# Altium PCB main_board.PcbDoc (part 1 of 3)
Units mm, origin at the board's own origin, x right, y up, seen from the top; angles counter-clockwise.
Board outline 156 x 135 mm, 4 copper layers (Top Side, Ground Plane, Power Plane, Bottom Side), stack 1.602 mm thick; 329 components, 291 nets, 1334 pads, 943 vias.
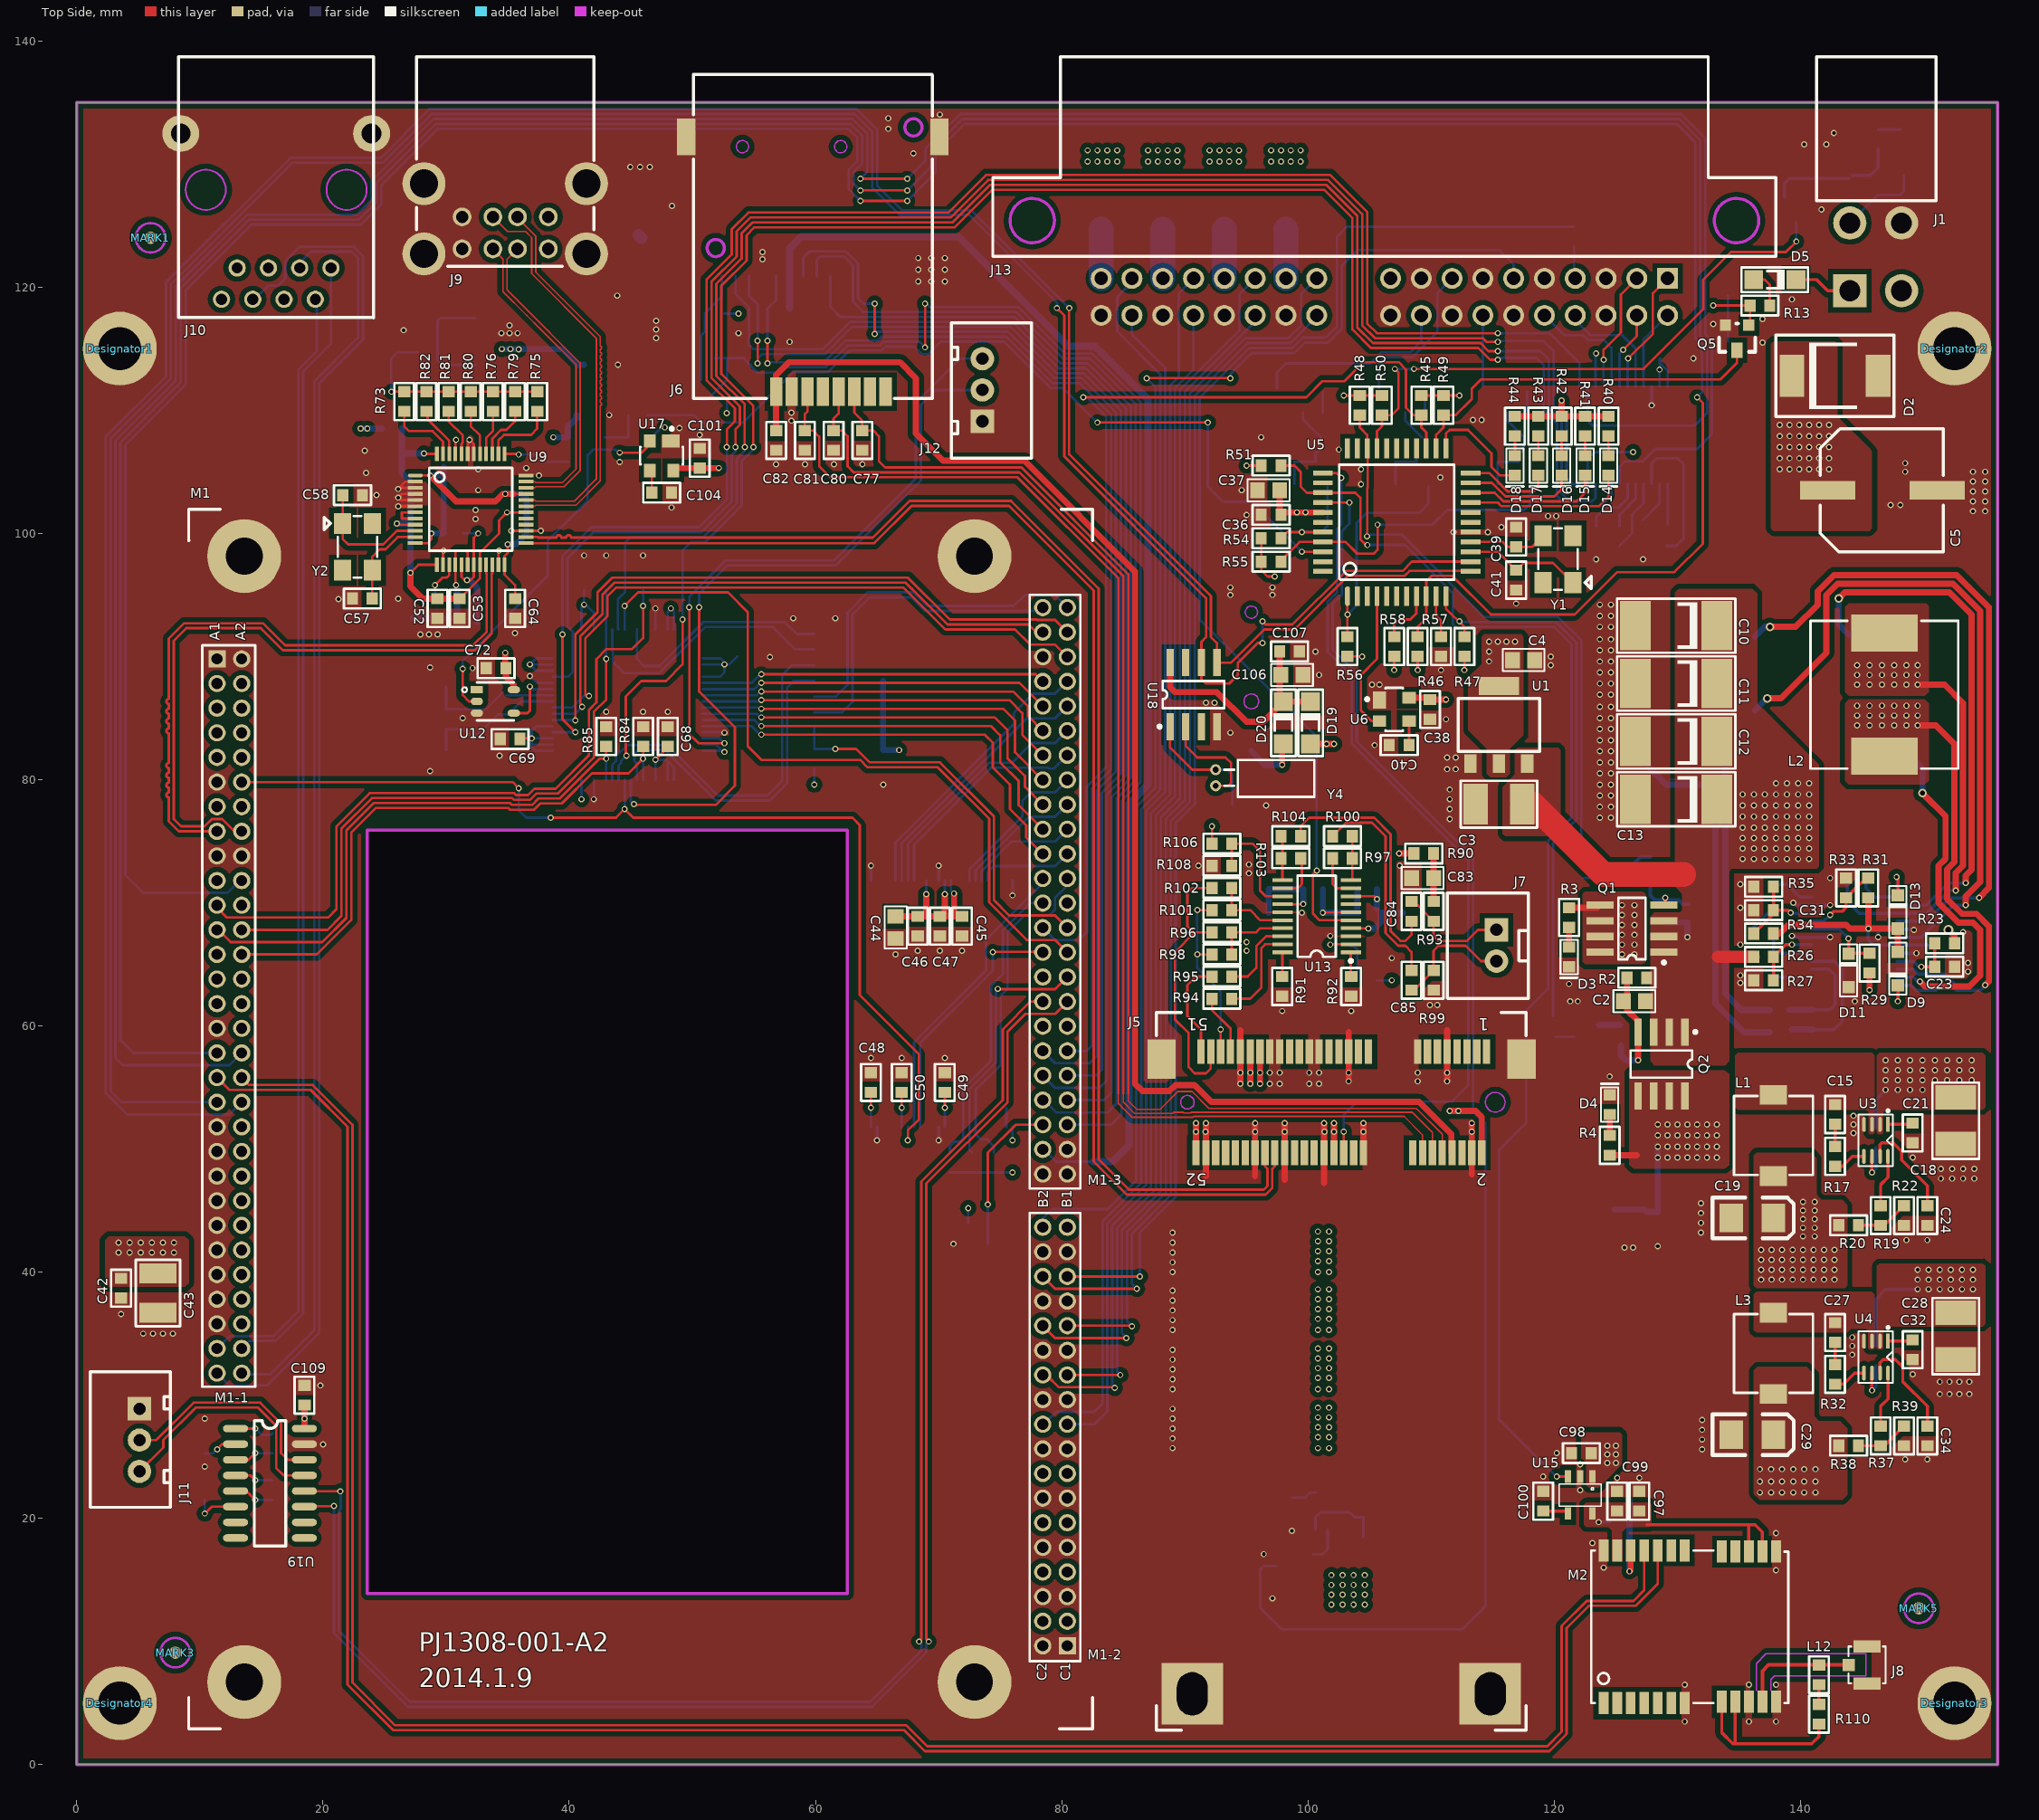
[diagram p0: Top Side view]
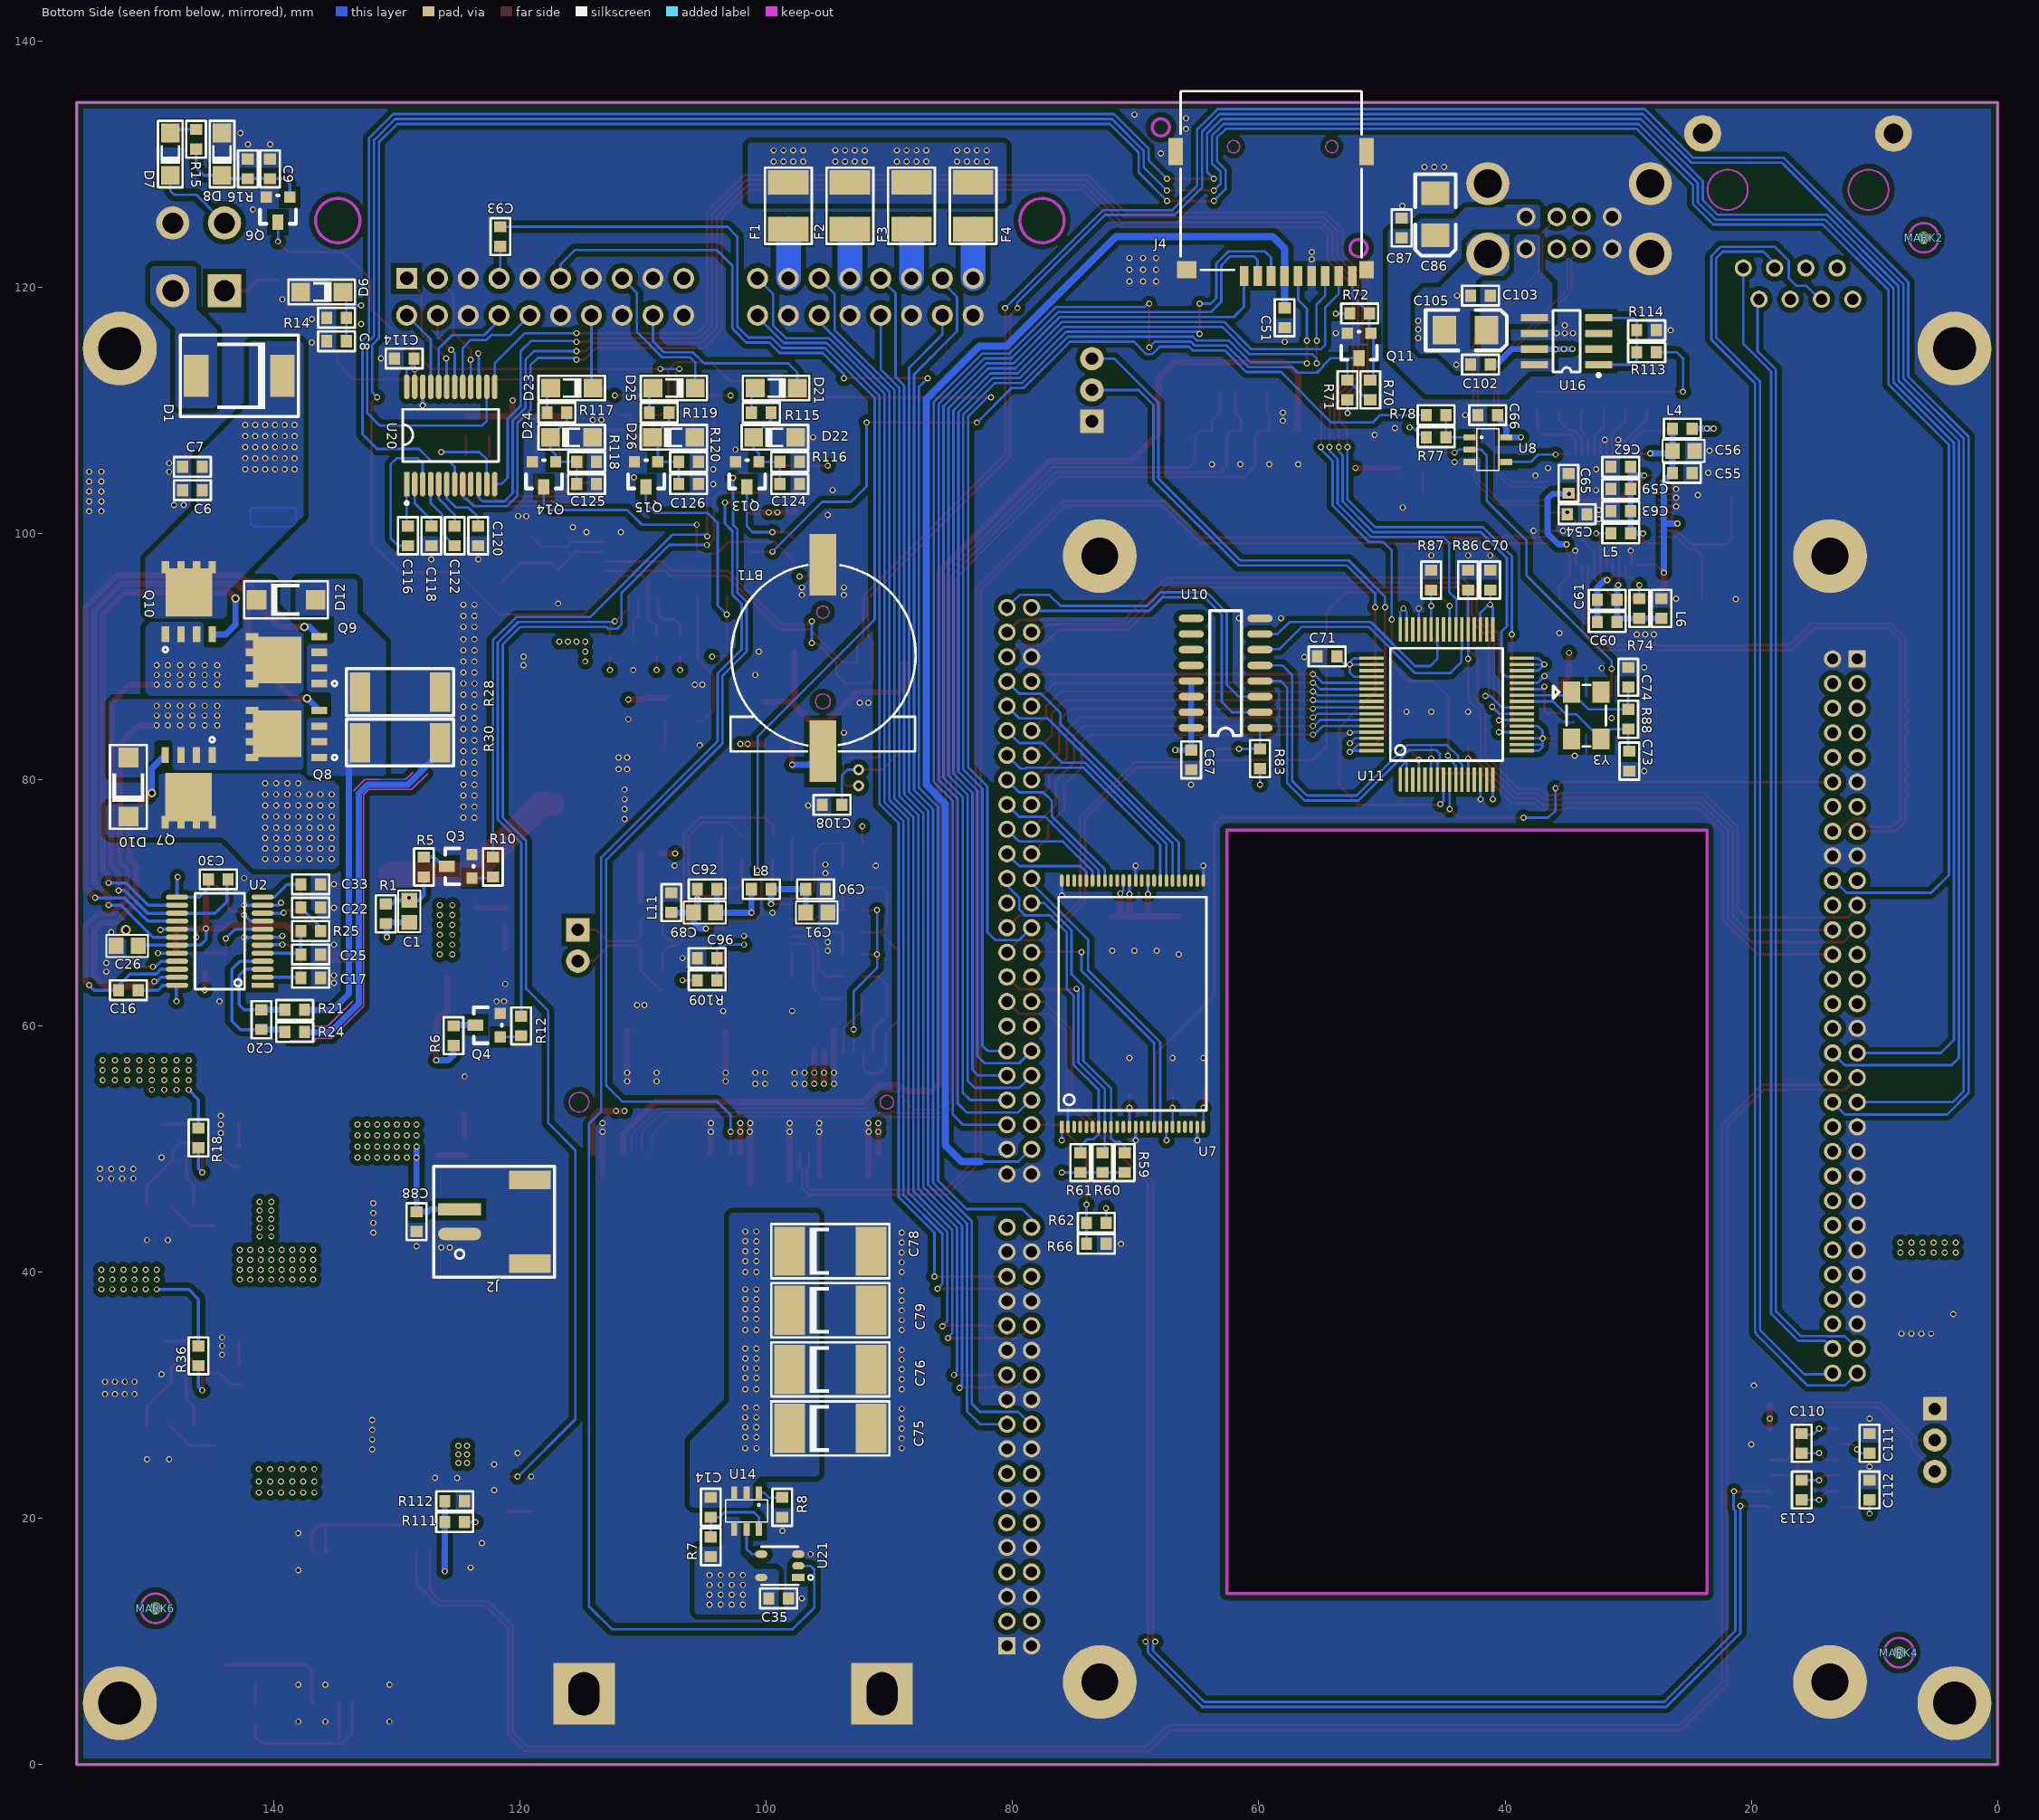
[diagram p1: Bottom Side view, seen from below]
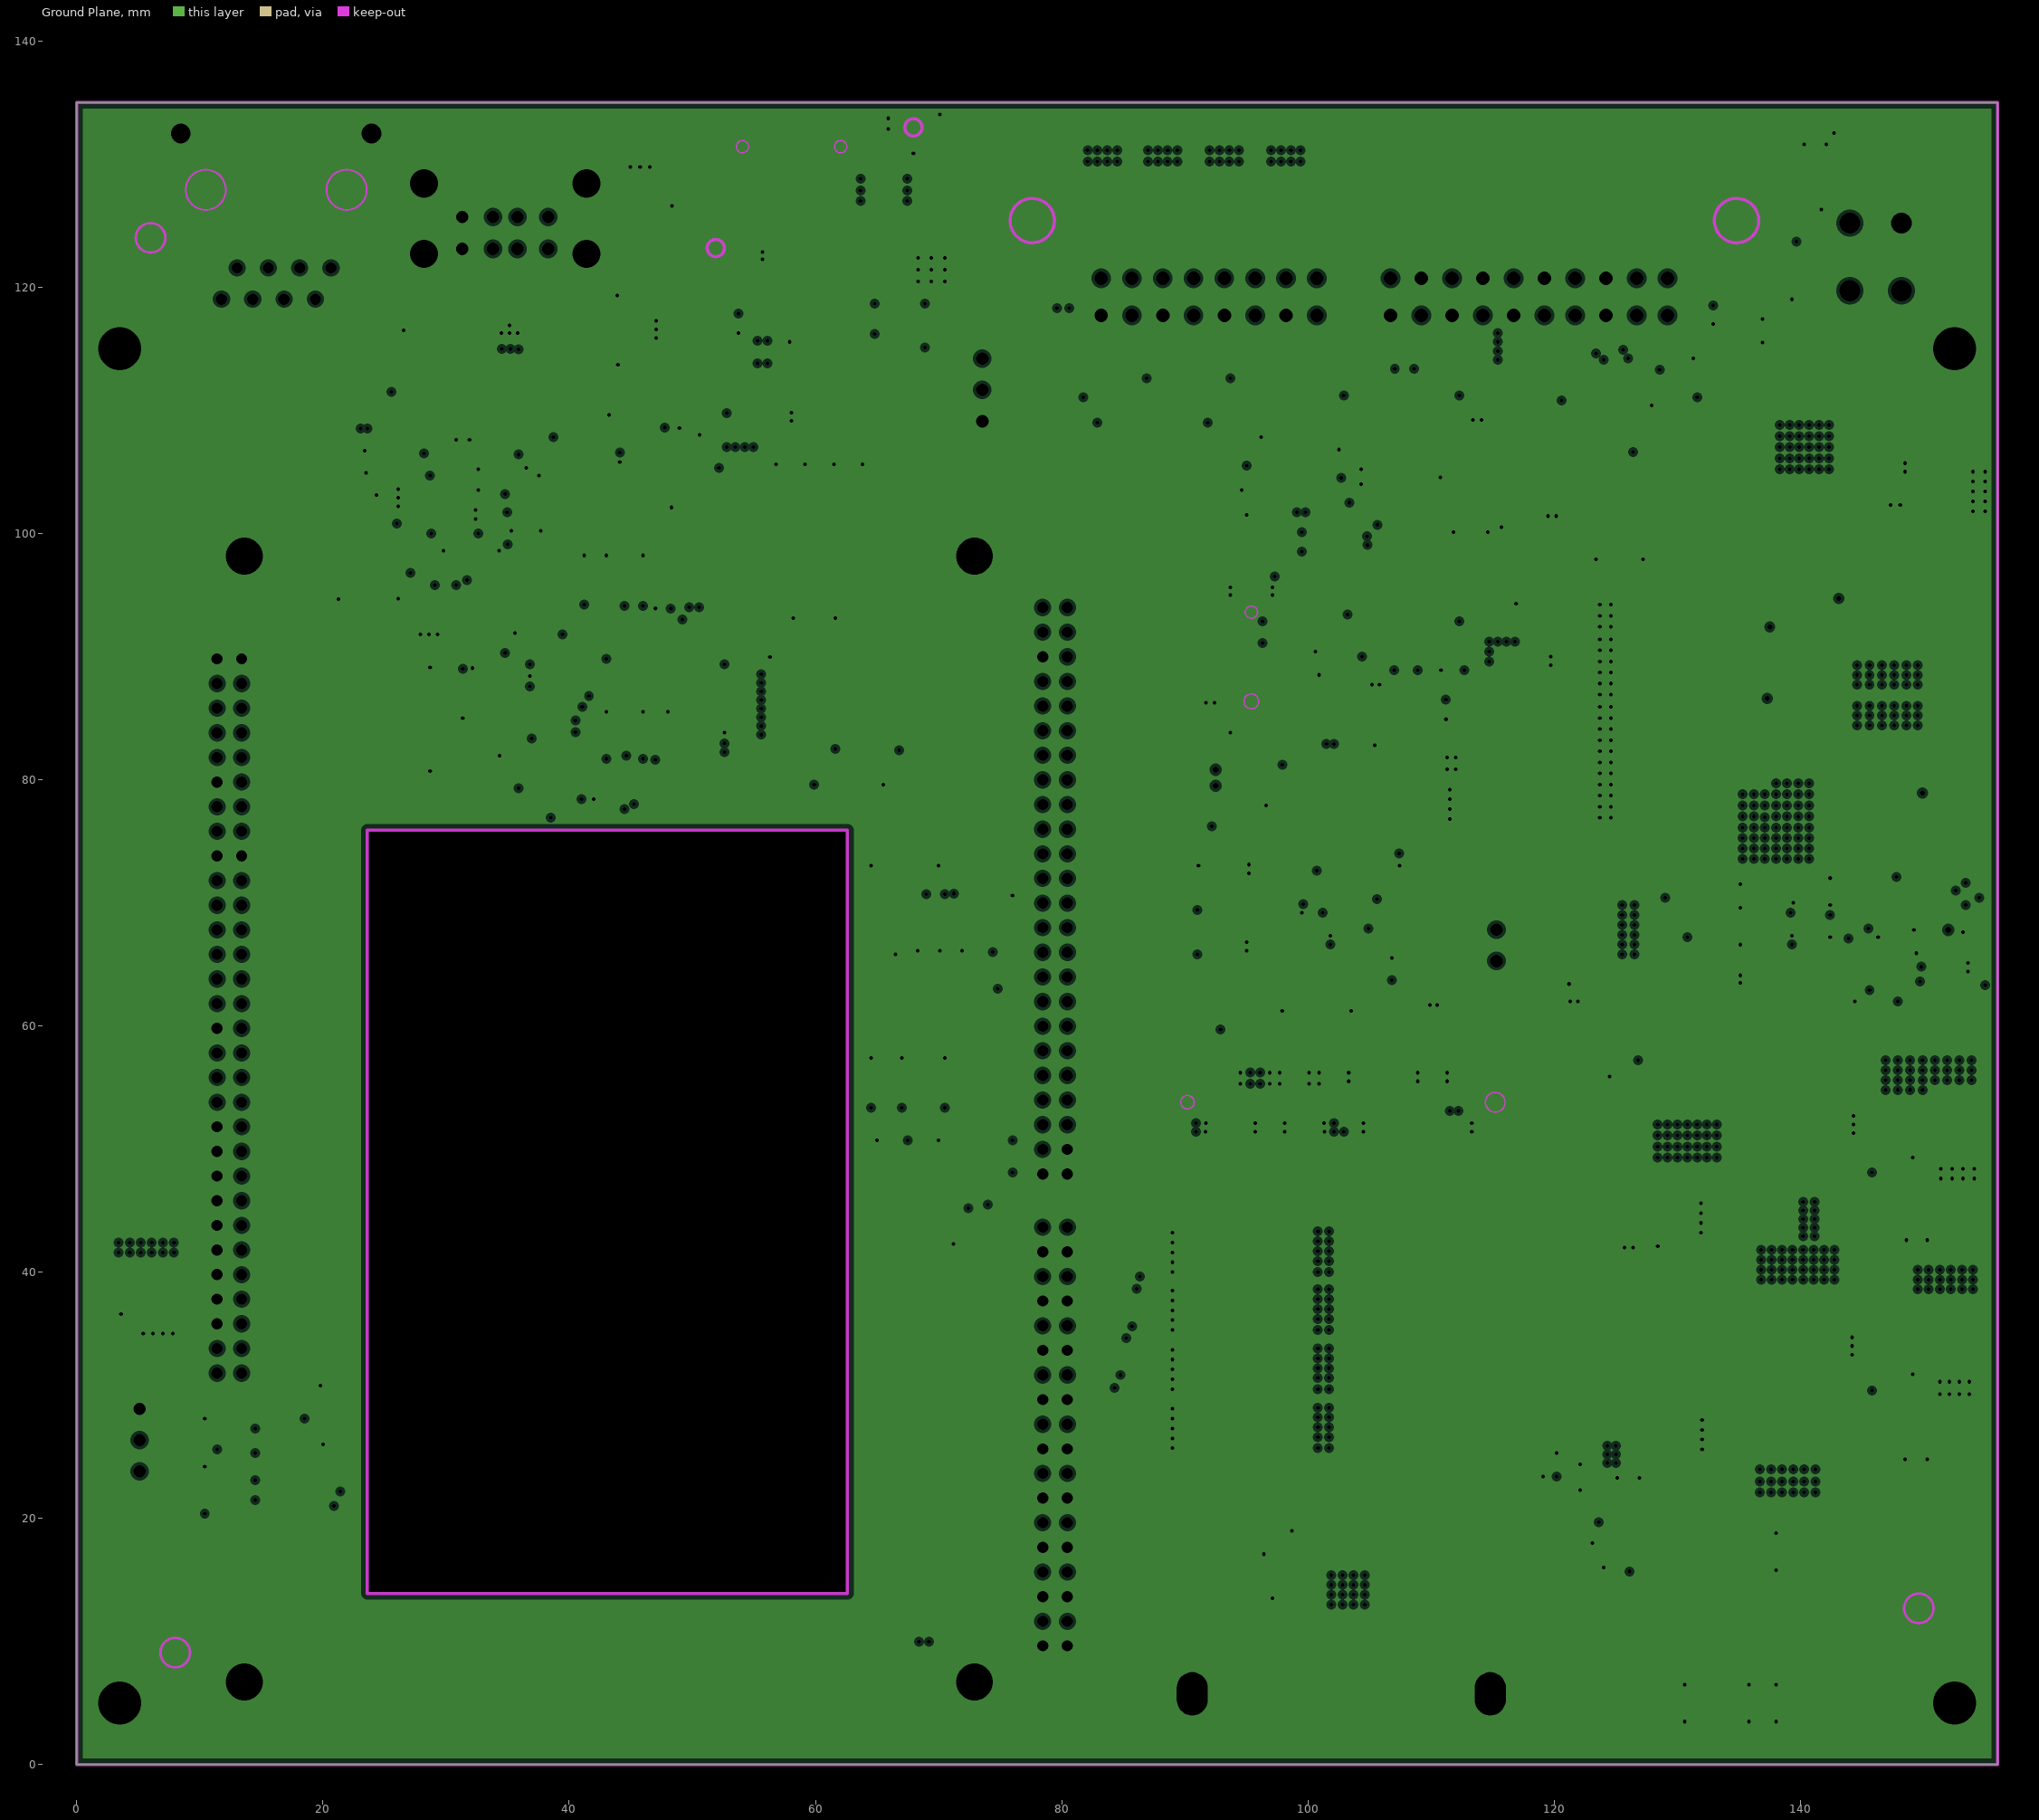
[diagram p2: Ground Plane, clearances drawn from the general rule]
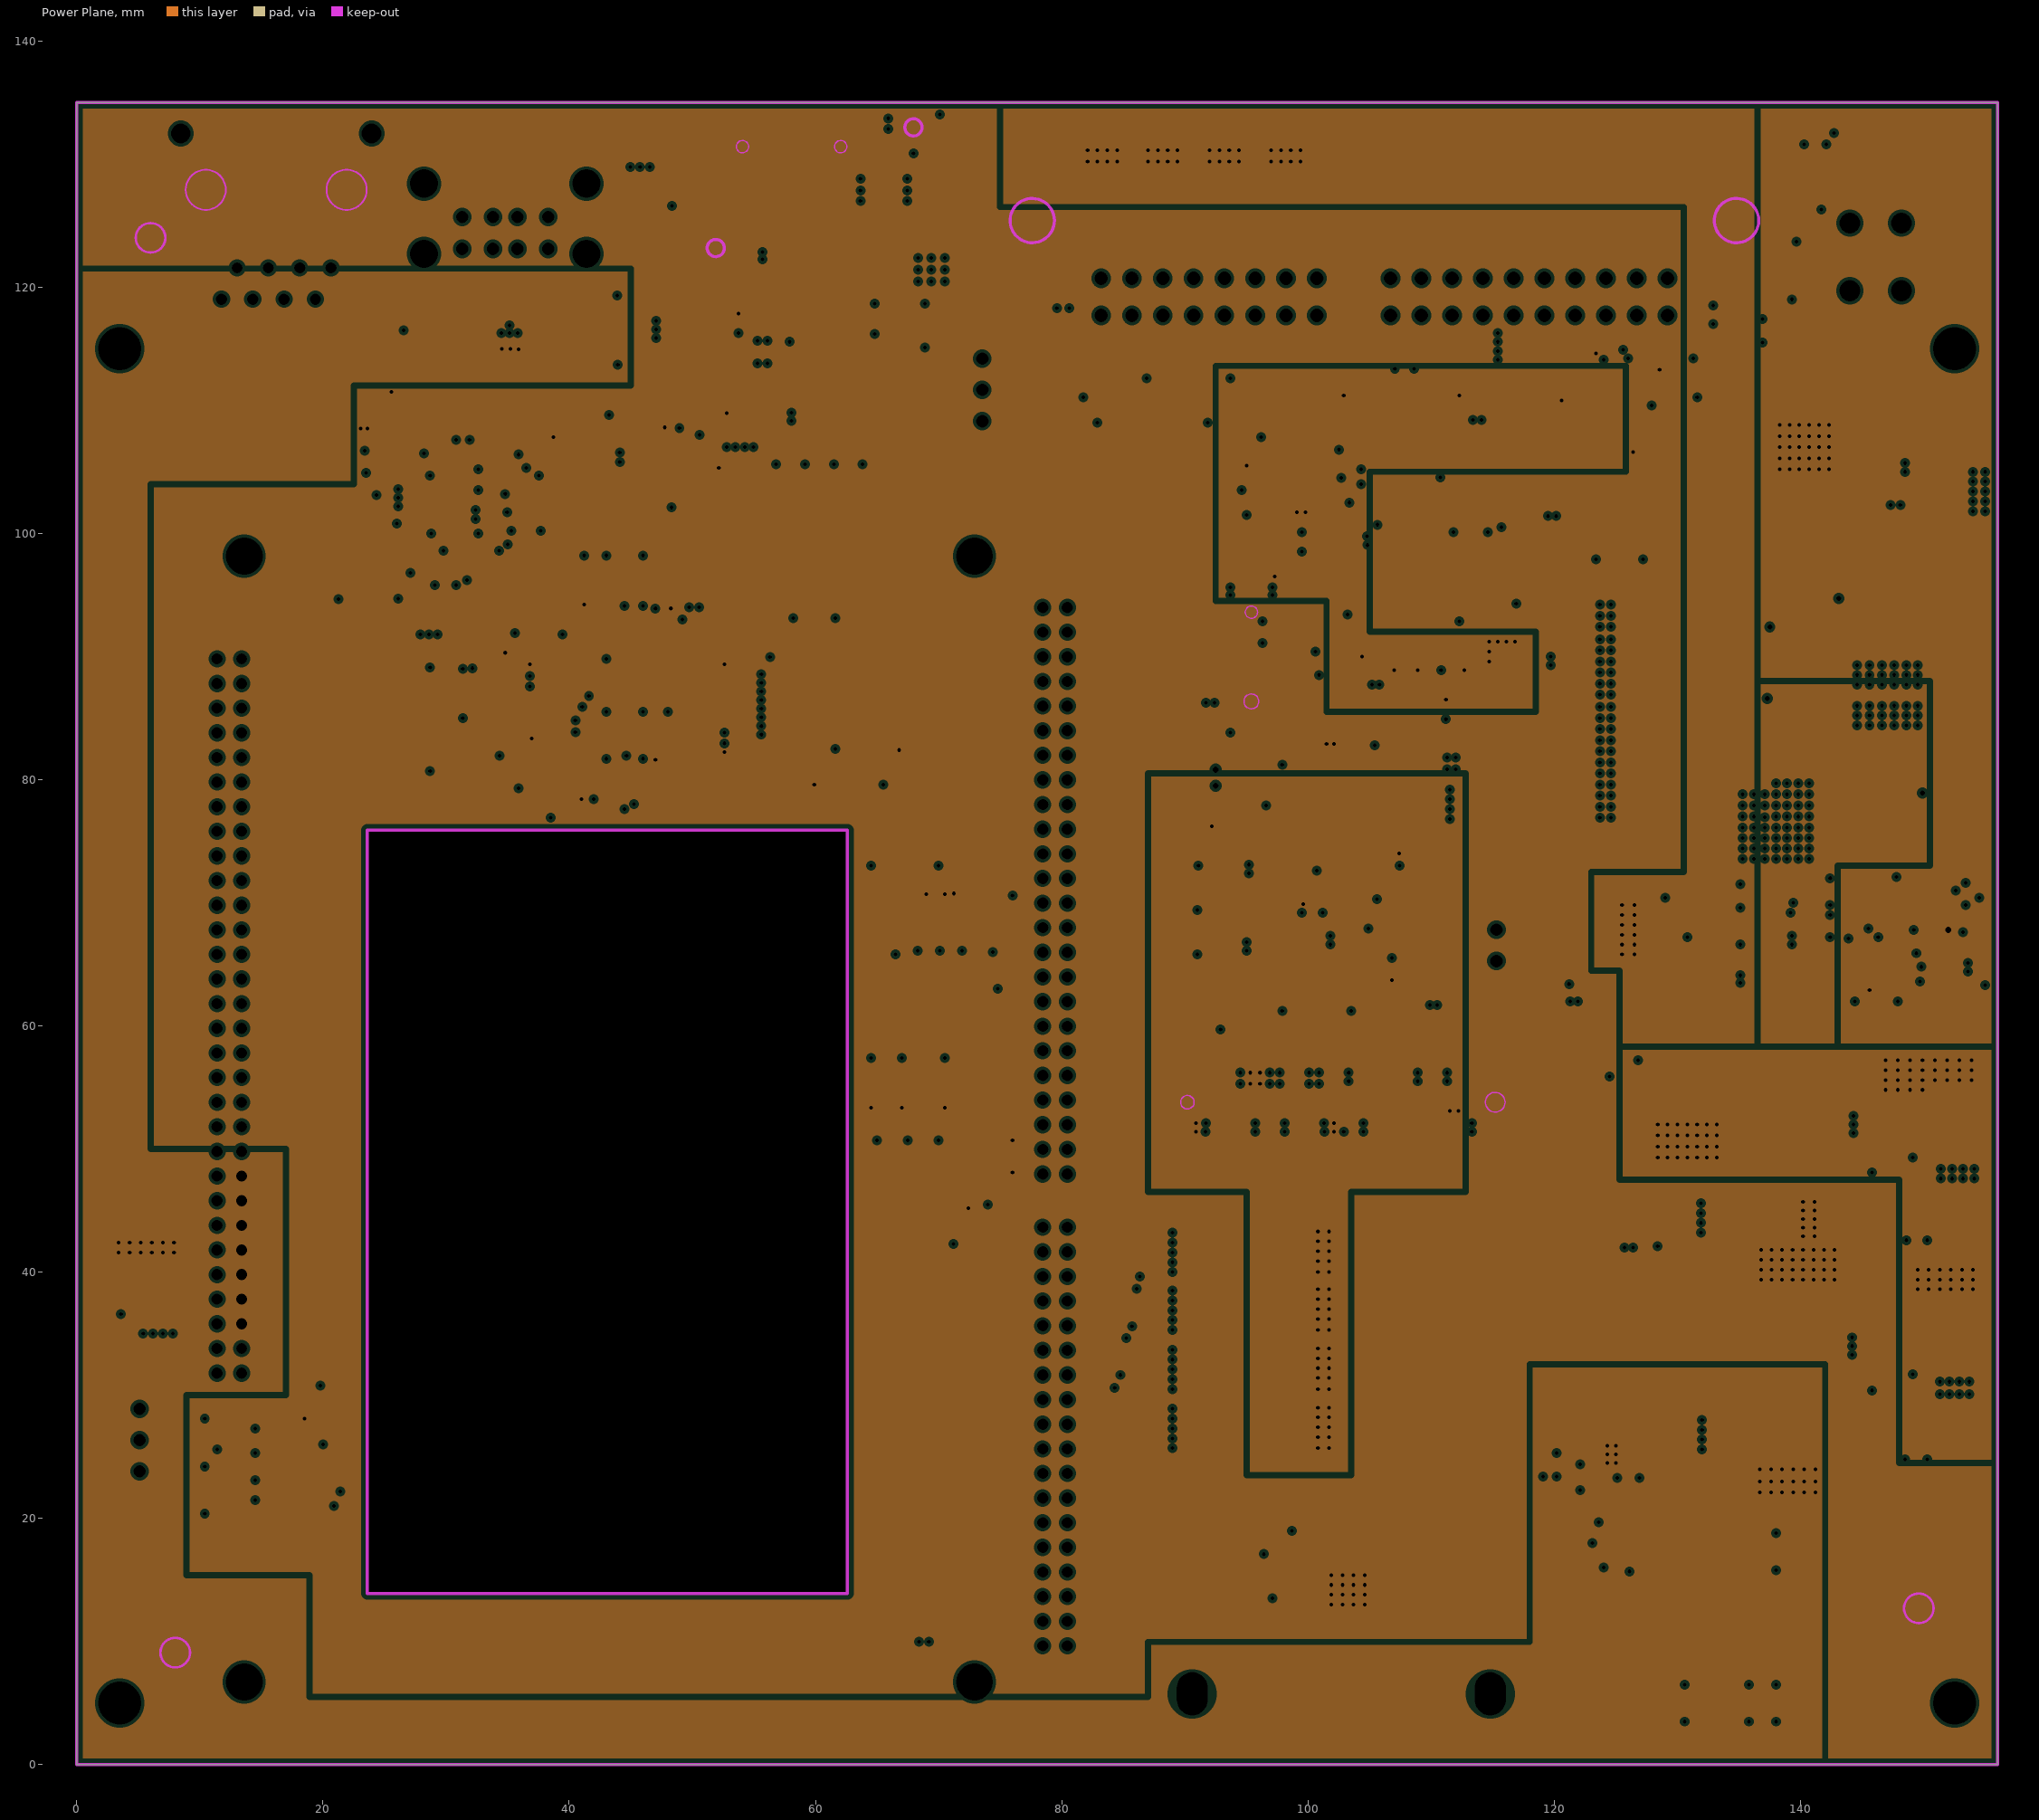
[diagram p3: Power Plane, clearances drawn from the general rule]

## Layer stack, top to bottom
Top Side: signal copper 0.0356
Dielectric: core 0.23, FR-4, Dk 4.8
Ground Plane: plane copper 0.0356, net GND
Dielectric: prepreg 1, FR-4, Dk 4.8
Power Plane: plane copper 0.0356, net (Multiple Nets)
Dielectric: core 0.23, FR-4, Dk 4.8
Bottom Side: signal copper 0.0356

## Board outline
0,0 156,0 156,135 0,135 0,0
cut-out: 23.6,75.9 23.6,13.9 62.6,13.9 62.6,75.9

## Design rules (kind name [scope] priority, off if disabled: settings)
Clearance Clearance_1 [InNet('GND')] p1 off: gap=0.4
Clearance [All] p2: gap=0.2
ComponentClearance [All] p1: gap=0 collisioncheckmode=3 verticalgap=0 showdistances=FALSE
DiffPairsRouting [All] p1: maxlimit=0.2 minlimit=0.2 mostfreqgap=0.2 maxuncoupledlength=12.7
PlaneClearance PlaneClearance_1 [InPadClass('MT') OR    InComponent('Designator1') OR InComponent('Designator2') OR InComponent('Designator3') OR InComponent('Designator4')] p1: clearance=1
PlaneClearance [All] p2: clearance=0.254
PlaneConnect [All] p1: planeconnectstyle=Direct reliefexpansion=0.2 reliefentries=4 reliefconductorwidth=0.2 reliefairgap=0.2
PolygonConnect [All] p1: connectstyle=Direct reliefconductorwidth=0.254 reliefentries=4 polygonreliefangle="90 Angle"
RoutingVias [All] p1: holewidth=0.3 width=0.5 viastyle="Through Hole" minholewidth=0.3 minwidth=0.5 maxholewidth=0.3 maxwidth=0.5
SilkscreenOverComponentPads [All] p1: minsilkscreentomaskgap=0.254
SolderMaskExpansion [All] p1: expansion=0.102
Width Width_1 [InNet('NetJ8_1')] p1: maxlimit=0.296 minlimit=0.296 preferedwidth=0.296 impedancedriven=TRUE minimp=50.000000 maximp=50.000000 favimp=50.000000
Width [All] p2: maxlimit=4 minlimit=0.127 preferedwidth=0.2 minimp=50.000000 maximp=50.000000 favimp=50.000000
23 further rules are at their usual default settings.

## Classes and differential pairs
pad class MT: J5-M5 J5-M6 M1-M1 M1-M2 M1-M3 M1-M4
component class [12]IO_PORT: C124 C125 C126 D21 D22 D23 D24 D25 D26 F1 F2 F3 F4 J13 Q13 Q14 Q15 R115 R116 R117 R118 R119 R120
component class [11]SERIAL_PORT: C109 C110 C111 C112 C113 C114 C116 C118 C120 C122 J11 J12 U19 U20
component class [10]MISC: BT1 C86 C87 C101 C102 C103 C104 C105 C106 C107 C108 D19 D20 J9 J10 R113 R114 U16 U17 U18 Y4
component class [08]GPS: C97 C98 C99 C100 J8 L12 M2 R110 R111 R112 U15
component class [07]CELLULAR: C14 C35 C75 C76 C77 C78 C79 C80 C81 C82 C83 C84 C85 C89 C90 C91 C92 C93 C96 J5 J6 J7 L8 L11 R7 R8 R90 R91 R92 R93 R94 R95 R96 R97 R98 R99 R100 R101 R102 R103 R104 R106 R108 R109 U13 U14 U21
component class [06]EXT_UART: C67 C68 C69 C70 C71 C72 C73 C74 R83 R84 R85 R86 R87 R88 U10 U11 U12 Y3
component class [05]USB_HUB: C52 C53 C54 C55 C56 C57 C58 C59 C60 C61 C62 C63 C64 C65 C66 L4 L5 L6 R73 R74 R75 R76 R77 R78 R79 R80 R81 R82 U8 U9 Y2
component class [04]STORAGE: C44 C45 C46 C47 C48 C49 C50 C51 J4 Q11 R59 R60 R61 R62 R66 R70 R71 R72 U7
component class [03]CORE_BOARD: C42 C43 M1
component class [02]MCU: C36 C37 C38 C39 C40 C41 D14 D15 D16 D17 D18 R40 R41 R42 R43 R44 R45 R46 R47 R48 R49 R50 R51 R54 R55 R56 R57 R58 U5 U6 Y1
component class [01]POWER: C1 C2 C3 C4 C5 C6 C7 C8 C9 C10 C11 C12 C13 C15 C16 C17 C18 C19 C20 C21 C22 C23 C24 C25 C26 C27 C28 C29 C30 C31 C32 C33 C34 C88 D1 D2 D3 D4 D5 D6 D7 D8 D9 D10 D11 D12 D13 J1 J2 L1 L2 L3 Q1 Q2 Q3 Q4 Q5 Q6 Q7 Q8 Q9 Q10 R1 R2 R3 R4 R5 R6 R10 R12 R13 R14 R15 R16 R17 R18 R19 R20 R21 R22 R23 R24 R25 R26 R27 R28 R29 R30 R31 R32 R33 R34 R35 R36 R37 R38 R39 U1 U2 U3 U4
differential pair EXTUSB4: +EXTUSB4_P -EXTUSB4_N
differential pair EXTUSB3: +EXTUSB3_P -EXTUSB3_N
differential pair EXTUSB1: +EXTUSB1_P -EXTUSB1_N
differential pair USB1: +USB1_P -USB1_N
differential pair USB0: +USB0_P -USB0_N
differential pair MIC: +MIC_P -MIC_N
differential pair E0TX: +E0TX_P -E0TX_N
differential pair E0RX: +E0RX_P -E0RX_N

## Components (designator, comment, footprint, x,y, rotation, side; value= is the part's Value field where it differs from the comment)
BT1 "Battery" CR1220 95.4,90.1 r270 bottom
C1 "1uF/25V" 0805 129,70.2 r270 bottom
C2 "1uF/25V" 0805 125.6,62 r0 top
C3 "10uF/25V" 1812 113.6,78 r0 top
C4 "10uF/6.3V" 0805 118.4,89.7 r180 top
C5 "220uF/50V" DL-10*10.5 146.6,103.5 r90 top
C6 "0.1uF" 0603 146.6,103.5 r90 bottom
C7 "1000pF" 0603 146.6,105.4 r90 bottom
C8 "0.1uF" 0603 134.9,115.6 r270 bottom
C9 "0.1uF" 0603 140.3,129.6 r0 bottom
C10 "100uF/20V(tan)" 7343 129.9,92.5 r270 top
C11 "100uF/20V(tan)" 7343 129.9,87.8 r270 top
C12 "100uF/20V(tan)" 7343 129.9,83.1 r270 top
C13 "100uF/20V(tan)" 7343 129.9,78.4 r270 top
C14 "2uF/6.3V" 0603 104.5,20.9 r180 bottom
C15 "0.1uF" 0603 142.8,52.8 r0 top
C16 "0.22uF" 0603 151.8,62.9 r90 bottom
C17 "0.033uF" 0603 137,63.9 r270 bottom
C18 "10uF/25V" 1812 152.6,50.4 r90 top
C19 "47uF/10V(tan)" 3528 137.8,44.4 r0 top
C20 "68pF" 0603 141,60.5 r0 bottom
C21 "0.022uF" 0603 149.1,51.3 r180 top
C22 "0.01uF" 0603 137,69.6 r270 bottom
C23 "0.1uF" 0603 151.7,64.8 r270 top
C24 "0.1uF" 0603 150.3,44.6 r180 top
C25 "100pF" 0603 137,65.8 r90 bottom
C26 "4.7uF/16V" 0805 151,66.5 r0 bottom
C27 "0.1uF" 0603 142.8,35.1 r0 top
C28 "10uF/25V" 1812 152.6,32.9 r90 top
C29 "47uF/10V(tan)" 3528 137.8,26.8 r0 top
C30 "0.22uF" 0603 144.5,71.9 r270 bottom
C31 "1000pF" 0603 137,69.4 r270 top
C32 "0.022uF" 0603 149.1,33.7 r180 top
C33 "0.01uF" 0603 137,71.5 r270 bottom
C34 "0.1uF" 0603 150.3,26.7 r180 top
C35 "0.1uF" 0603 99,13.5 r90 bottom
C36 "0.1uF" 0603 97,101.5 r90 top
C37 "10uF/6.3V" 0805 95.9,103.5 r0 top
C38 "0.1uF" 0603 109.9,85.7 r180 top
C39 "27pF" 0603 116.9,99.7 r0 top
C40 "0.1uF" 0603 107.4,82.8 r270 top
C41 "27pF" 0603 116.9,96.2 r180 top
C42 "0.01uF" 0603 3.6,38.7 r180 top
C43 "22uF/10V" 1210 6.6,36.7 r90 top
C44 "10uF/6.3V" 0805 66.5,67.1 r90 top
C45 "0.1uF" 0603 71.9,68.1 r180 top
C46 "0.1uF" 0603 68.3,68.1 r180 top
C47 "0.1uF" 0603 70.1,68.1 r180 top
C48 "0.1uF" 0603 64.5,55.4 r0 top
C49 "0.1uF" 0603 70.5,55.4 r0 top
C50 "0.1uF" 0603 67,55.4 r0 top
C51 "0.1uF" 0603 57.9,117.5 r0 bottom
C52 "0.1uF" 0603 29.3,93.9 r180 top
C53 "0.1uF" 0603 31.1,93.9 r180 top
C54 "0.1uF" 0603 34.15,101.55 r270 bottom
C55 "0.1uF" 0603 25.6,104.9 r270 bottom
C56 "10uF/6.3V" 0805 24.6,106.7 r0 bottom
C57 "22pF" 0603 23.2,94.7 r90 top
C58 "22pF" 0603 22.4,103.1 r270 top
C59 "0.1uF" 0603 30.6,103.6 r90 bottom
C60 "0.1uF" 0603 31.7,92.8 r270 bottom
C61 "4.7uF/6.3V" 0603 31.7,94.6 r270 bottom
C62 "4.7uF/6.3V" 0603 30.6,105.4 r90 bottom
C63 "0.1uF" 0603 30.6,101.8 r90 bottom
C64 "0.1uF" 0603 35.6,93.9 r180 top
C65 "0.1uF" 0603 34.85,104.05 r180 bottom
C66 "0.1uF" 0603 41.4,109.6 r270 bottom
C67 "0.1uF" 0603 65.5,81.6 r180 bottom
C68 "0.1uF" 0603 48,83.5 r0 top
C69 "0.1uF" 0603 35.2,83.3 r90 top
C70 "0.1uF" 0603 41.2,96.2 r180 bottom
C71 "0.1uF" 0603 54.45,90 r90 bottom
C72 "0.1uF" 0603 34.05,89.05 r270 top
C73 "22pF" 0603 29.9,81.5 r0 bottom
C74 "22pF" 0603 30,88.3 r180 bottom
C75 "680uF/6.3V" 7343 94.8,27.3 r90 bottom
C76 "680uF/6.3V" 7343 94.8,32.1 r90 bottom
C77 "33pF" 0603 63.8,107.55 r0 top
C78 "680uF/6.3V" 7343 94.8,41.7 r90 bottom
C79 "680uF/6.3V" 7343 94.8,36.9 r90 bottom
C80 "33pF" 0603 61.467,107.55 r0 top
C81 "33pF" 0603 59.133,107.55 r0 top
C82 "0.1uF" 0603 56.8,107.55 r0 top
C83 "10uF/6.3V" 0805 110.2,72 r180 top
C84 "0.22uF/50V" 0603 108.4,69.3 r180 top
C85 "0.22uF/50V" 0603 108.4,63.7 r0 top
C86 "33uF/16V(tan)" 3528 45.65,124.2 r270 bottom
C87 "0.1uF" 0603 48.4,124.8 r0 bottom
C88 "0.1uF" 0603 128.4,44.1 r0 bottom
C89 "22uF/6.3V" 0805 105.9,69.2 r180 bottom
C90 "0.1uF" 0603 96,71.1 r270 bottom
C91 "22uF/6.3V" 0805 95,69.2 r0 bottom
C92 "0.1uF" 0603 104.8,71.1 r90 bottom
C93 "0.22uF/50V" 0603 121.6,124.1 r180 bottom
C96 "NC" 0603 104.8,65.5 r270 bottom
C97 "0.1uF" 0603 126.9,21.4 r180 top
C98 "1uF/6.3V" 0603 122.2,25.3 r270 top
C99 "1uF/6.3V" 0603 125.1,21.4 r180 top
C100 "0.1uF" 0603 119.1,21.4 r180 top
C101 "0.1uF" 0603 50.6,106.1 r0 top
C102 "0.1uF" 0603 42,113.7 r270 bottom
C103 "0.1uF" 0603 42,119.3 r270 bottom
C104 "0.1uF" 0603 47.5,103.3 r90 top
C105 "33uF/16V(tan)" 3528 41.5,116.5 r180 bottom
C106 "10uF/6.3V" 0805 97.8,88.5 r0 top
C107 "0.1uF" 0603 98.5,90.4 r90 top
C108 "15pF" 0603 94.65,77.95 r270 bottom
C109 "0.1uF" 0603 18.5,30 r180 top
C110 "0.1uF" 0603 15.9,26.1 r180 bottom
C111 "0.1uF" 0603 10.4,26.1 r0 bottom
C112 "0.1uF" 0603 10.4,22.3 r0 bottom
C113 "0.1uF" 0603 15.9,22.3 r180 bottom
C114 "0.1uF" 0603 129.4,114.2 r270 bottom
C116 "0.1uF" 0603 129.1,99.8 r0 bottom
C118 "0.1uF" 0603 127.2,99.8 r180 bottom
C120 "0.1uF" 0603 123.4,99.8 r180 bottom
C122 "0.1uF" 0603 125.3,99.8 r180 bottom
C124 "0.1uF" 0603 98.1,104 r90 bottom
C125 "0.1uF" 0603 114.6,104 r90 bottom
C126 "0.1uF" 0603 106.3,104 r90 bottom
D1 "MBR360" DO214AB 146.3,112.8 r180 bottom
D2 "SMDJ33A" DO214AB 146.3,112.8 r180 top
D3 "LED GREEN" LED0603 121.2,66.4 r0 top
D4 "LED GREEN" LED0603 124.5,52.8 r180 top
D5 "ZMM55-C6V2" MINI-MELF 136.2,120.6 r0 top
D6 "1N4148" MINI-MELF 137.8,119.6 r180 bottom
D7 "ZMM55-C6V2" MINI-MELF 148.4,132.5 r270 bottom
D8 "1N4148" MINI-MELF 144.2,132.5 r270 bottom
D9 "1N5819HW" 1N5819 147.9,63.3 r90 top
D10 "B360A" B320A 151.8,81.8 r270 bottom
D11 "MM3Z5V1ST1G" MM3Z5V1ST1G 143.9,64.5 r270 top
D12 "B360A" B320A 136.6,94.6 r0 bottom
D13 "1N5819HW" 1N5819 147.9,70.6 r270 top
D14 "LED GREEN" LED0603 124.4,106.3 r0 top
D15 "LED GREEN" LED0603 122.5,106.3 r0 top
D16 "LED GREEN" LED0603 120.6,106.3 r0 top
D17 "LED GREEN" LED0603 118.7,106.3 r0 top
D18 "LED GREEN" LED0603 116.8,106.3 r0 top
D19 "1N4148" MINI-MELF 100.2,82.9 r90 top
D20 "1N4148" MINI-MELF 98,82.9 r90 top
D21 "ZMM55-C6V2" MINI-MELF 100.9,111.8 r180 bottom
D22 "1N4148" MINI-MELF 97.6,107.8 r0 bottom
D23 "ZMM55-C6V2" MINI-MELF 117.5,111.8 r180 bottom
D24 "1N4148" MINI-MELF 114.1,107.8 r0 bottom
D25 "ZMM55-C6V2" MINI-MELF 109.2,111.8 r180 bottom
D26 "1N4148" MINI-MELF 105.8,107.8 r0 bottom
Designator1 "Comment" MT2#1 -10.7,110.1 r0 top
Designator2 "Comment" MT2#2 165.9,117.2 r0 top
Designator3 "Comment" MT2#3 155.7,-8 r0 top
Designator4 "Comment" MT2#4 -12.9,1.6 r0 top
F1 "500mA/16V" 1812 98.2,128.5 r270 bottom
F2 "500mA/16V" 1812 93.2,128.5 r270 bottom
F3 "500mA/16V" 1812 88.2,128.5 r270 bottom
F4 "500mA/16V" 1812 83.2,128.5 r270 bottom
J1 "POWER" 5557-4PIN 144,119.7 r90 top locked
J2 "FAN" XH2.0-2P-SMD 124.9,43.1 r270 bottom
J4 "TF Card Connector" TFCARD-2 59,131.4 r0 bottom locked
J5 "MINI-PCIE" MINI-PCIE 115.2,53.8 r180 top locked
J6 "SIMCARD" SIMLOCK2 56.8,111.5 r90 top locked
J7 "MIC" CON-2PIN 115.3,67.8 r90 top
J8 "GPS ANT" ANT 145.4,8.1 r270 top
J9 "USB HOST" USB-HOST-2 31.3,125.7 r0 top locked
J10 "ETHERNET" RJ45 16.2,127.9 r180 top locked
J11 "CONSOLE" CONN-3P 5.1,28.9 r270 top
J12 "DISPLAY COMM" CONN-3P 73.55,109.1 r90 top
J13 "I/O" AMP174146 129.2,120.7 r180 top locked
L1 "4.7uH/4A" IND-4.7UH-4A 137.8,51.1 r180 top
L2 "8.2uH/6.25A" IND-8.2UH-10A 146.8,86.9 r180 top
L3 "4.7uH/4A" IND-4.7UH-4A 137.8,33.4 r180 top
L4 "300ohm/100MHz BEAD" 0603 25.6,108.5 r90 bottom
L5 "300ohm/100MHz BEAD" 0603 30.6,100 r90 bottom
L6 "300ohm/100MHz BEAD" 0603 27.3,93.9 r0 bottom
L8 "300ohm/100MHz BEAD" 0603 100.4,71.1 r90 bottom
L11 "300ohm/100MHz BEAD" 0603 107.7,70 r0 bottom
L12 "27nH" 0603 141.5,7.3 r180 top
M1 "EM9008-CORE-BOARD" EM9008 82.5,2.9 r90 top locked
M2 "NEO-6M" NEO-6 124,5 r270 top
MARK1 "" MARK 6,124 r0 top locked
MARK2 "" MARK 6,124 r180 bottom locked
MARK3 "" MARK 8,9.1 r0 top locked
MARK4 "" MARK 8,9.1 r180 bottom locked
MARK5 "" MARK 149.6,12.7 r0 top locked
MARK6 "" MARK 149.6,12.7 r180 bottom locked
Q1 "AO4435" SO8 126.3,67.9 r90 top
Q2 "AO4435" SO8 128.7,56.9 r180 top
Q3 "S9014" NPN 123.9,72 r90 bottom
Q4 "S9014" NPN 121.6,59.1 r90 bottom
Q5 "S9014" NPN 135.8,116.9 r180 top
Q6 "S9014" NPN 138.7,127.3 r0 bottom
Q7 "SI7460DP" POWERPAK 145,82 r270 bottom
Q8 "SI7460DP" POWERPAK 136.3,81.8 r0 bottom
Q9 "SI7460DP" POWERPAK 136.3,87.8 r0 bottom
Q10 "SI7460DP" POWERPAK 148.8,91.8 r90 bottom
Q11 "S9014/NC" NPN 50.9,116.25 r0 bottom
Q13 "S9014" NPN 100.6,105.8 r0 bottom
Q14 "S9014" NPN 117.1,105.8 r0 bottom
Q15 "S9014" NPN 108.8,105.8 r0 bottom
R1 "100K" 0603 130.9,69.1 r180 bottom
R2 "100K" 0603 126.7,63.9 r90 top
R3 "1K" 0603 121.2,68.8 r180 top
R4 "1K" 0603 124.5,50.3 r0 top
R5 "10K" 0603 127.8,72.9 r180 bottom
R6 "10K" 0603 125.4,59.2 r180 bottom
R7 "10K" 0603 104.5,17.7 r0 bottom
R8 "1K" 0603 98.7,20.9 r0 bottom
R10 "4.7K" 0603 122.2,72.9 r180 bottom
R12 "4.7K" 0603 119.9,60 r180 bottom
R13 "15K" 0603 136.7,118.5 r90 top
R14 "47K" 0603 134.9,117.5 r270 bottom
R15 "15K" 0603 146.3,132 r0 bottom
R16 "47K" 0603 142.1,129.6 r0 bottom
R17 "10" 0603 142.8,49.4 r0 top
R18 "100K" 0603 146.1,50.9 r0 bottom
R19 "33K/1%" 0603 146.5,44.6 r180 top
R20 "40.2K/1%" 0603 143.9,43.8 r90 top
R21 "100" 0603 138.3,61.3 r270 bottom
R22 "13K/1%" 0603 148.4,44.6 r0 top
R23 "10" 0603 151.7,66.7 r90 top
R24 "100" 0603 138.3,59.5 r270 bottom
R25 "100K/1%" 0603 137,67.7 r270 bottom
R26 "113K/1%" 0603 137,65.6 r90 top
R27 "8.06K/1%" 0603 137,63.7 r270 top
R28 "0.018/1W" 2512 126.5,87.1 r0 bottom
R29 "220K" 0603 145.6,65.1 r180 top
R30 "0.018/1W" 2512 126.5,83 r0 bottom
R31 "NC" 0603 145.5,71.2 r180 top
R32 "10" 0603 142.8,31.7 r0 top
R33 "0" 0603 143.7,71.2 r0 top
R34 "15K" 0603 137,67.5 r90 top
R35 "10K/1%" 0603 137,71.3 r270 top
R36 "100K" 0603 146.1,33.2 r0 bottom
R37 "33K/1%" 0603 146.5,26.7 r180 top
R38 "40.2K/1%" 0603 143.9,25.9 r90 top
R39 "7.68K/1%" 0603 148.4,26.7 r0 top
R40 "200" 0603 124.4,108.7 r0 top
R41 "200" 0603 122.5,108.7 r0 top
R42 "200" 0603 120.6,108.7 r0 top
R43 "200" 0603 118.7,108.7 r0 top
R44 "200" 0603 116.8,108.7 r0 top
R45 "4.7K" 0603 109.2,110.4 r0 top
R46 "4.7K" 0603 108.9,90.8 r180 top
R47 "4.7K" 0603 112.7,90.8 r180 top
R48 "4.7K" 0603 104.2,110.4 r0 top
R49 "10K" 0603 111,110.4 r0 top
R50 "10K" 0603 106,110.4 r0 top
R51 "10K" 0603 97,105.5 r90 top
R54 "10K" 0603 97,99.6 r90 top
R55 "10K" 0603 97,97.7 r90 top
R56 "10K" 0603 103.2,90.8 r180 top
R57 "0" 0603 110.8,90.8 r0 top
R58 "10K" 0603 107,90.8 r0 top
R59 "4.7K" 0603 70.9,48.9 r180 bottom
R60 "4.7K" 0603 72.7,48.9 r180 bottom
R61 "4.7K" 0603 74.5,48.9 r180 bottom
R62 "NC" 0603 73.2,44 r270 bottom
R66 "0" 0603 73.2,42.3 r270 bottom
R70 "0" 0603 50.95,111.65 r180 bottom
R71 "10K/NC" 0603 52.8,111.65 r0 bottom
R72 "4.7K/NC" 0603 51.8,117.85 r90 bottom
R73 "0" 0603 26.6,110.7 r0 top
R74 "2.43K/1%" 0603 29.1,93.9 r0 bottom
R75 "510K" 0603 37.4,110.7 r180 top
R76 "510K" 0603 33.8,110.7 r180 top
R77 "10K" 0603 45.6,107.8 r90 bottom
R78 "0" 0603 45.6,109.6 r90 bottom
R79 "10K" 0603 35.6,110.7 r180 top
R80 "10K" 0603 32,110.7 r180 top
R81 "10K" 0603 30.2,110.7 r180 top
R82 "10K" 0603 28.4,110.7 r180 top
R83 "10K" 0603 59.9,81.7 r180 bottom
R84 "15K" 0603 46,83.5 r180 top
R85 "15K" 0603 43,83.5 r180 top
R86 "15K" 0603 43,96.2 r0 bottom
R87 "15K" 0603 46,96.2 r0 bottom
R88 "1M" 0603 30,84.9 r180 bottom
R90 "1K" 0603 109.4,74 r270 top
R91 "0" 0603 97.9,63.2 r180 top
R92 "0" 0603 103.5,63.2 r0 top
R93 "2K" 0603 110.2,69.3 r0 top
R94 "0" 0603 93,62.2 r90 top
R95 "0" 0603 93,64 r90 top
R96 "0" 0603 93,67.6 r90 top
R97 "510K" 0603 102.8,73.6 r90 top
R98 "NC" 0603 93,65.8 r90 top
R99 "2K" 0603 110.2,63.7 r0 top
R100 "34K" 0603 102.8,75.4 r270 top
R101 "0" 0603 93,69.4 r90 top
R102 "NC" 0603 93,71.2 r90 top
R103 "510K" 0603 98.6,73.6 r270 top
R104 "34K" 0603 98.6,75.4 r90 top
R106 "0" 0603 93,74.8 r270 top
R108 "NC" 0603 93,73 r270 top
R109 "10K" 0603 104.8,63.7 r270 bottom
R110 "10" 0603 141.5,4.1 r0 top
R111 "0" 0603 125.3,19.7 r90 bottom
R112 "NC" 0603 125.3,21.4 r270 bottom
R113 "NC" 0603 28.5,114.7 r90 bottom
R114 "0" 0603 28.5,116.5 r90 bottom
R115 "15K" 0603 100.4,109.8 r270 bottom
R116 "47K" 0603 98.1,105.8 r90 bottom
R117 "15K" 0603 117,109.8 r270 bottom
R118 "47K" 0603 114.6,105.8 r90 bottom
R119 "15K" 0603 108.7,109.8 r270 bottom
R120 "47K" 0603 106.3,105.8 r90 bottom
U1 "AMS1117-3.3" AMS1117 115.5,81.3 r0 top
U2 "LTC3780EG" LTC3780EG 140.9,63.3 r0 bottom
U3 "MP1497DJ" TSOT23-8 147.1,52 r270 top
U4 "MP1497DJ" TSOT23-8 147.1,34.4 r270 top
U5 "IAP10L14X" LQFP44 103.2,94.9 r90 top
U6 "MAX812R" SOT143 105.8,86.4 r270 top
U7 "K9F2G08U0C" TSOP48 76,51.8 r90 bottom
U8 "74HC1G08" SOT23-5 42.9,107.8 r270 bottom
U9 "uPD720114" LQFP48 27.5,104.7 r0 top
U10 "74HC139" SO-16 59.9,84.2 r90 bottom
U11 "XR16V554IV" LQFP64 48.5,80 r90 bottom
U12 "74HC1G04" SOT753 32.5,87.3 r0 top
U13 "TLV320AIC1106PW" PW020 100.7,68.9 r270 top
U14 "TPS27081A" SOT23-6 100.6,22.1 r0 bottom
U15 "TPS73633DBVT" SOT23-5 123.1,23.4 r180 top
U16 "AP1212LS" SO8 35,115.6 r90 bottom
U17 "MAX811R" SOT143 48.2,107.5 r180 top
U18 "PCF8563T" SO8 90.7,86.9 r0 top
U19 "MAX3232" SO-16 12.9,27.3 r270 top
U20 "MAX3387E" SSOP24 129.2,104 r90 bottom
U21 "74HC1G04" SOT753 97.4,15.2 r0 bottom
Y1 "25MHz" SMD-XTAL-5032 120.3,97.9 r90 top
Y2 "30MHz" SMD-XTAL-5032 22.8,98.9 r270 top
Y3 "14.7456MHz" SMD-XTAL-5032 33.4,85.2 r270 bottom
Y4 "32.768KHz" XTAL 92.5,79.5 r90 top

## Footprints (in the part's own frame and the unit in brackets; to place one, negate y for a bottom-side part, rotate by r counter-clockwise, add the part's x,y. Pads: shape width x height; smd on the part's side, far side on the other; paste and mask are expansions set on the pad)
1N5819 [mm]
  rect 1x1 smd: 1(2.7,0) 2(0,0)
  silkscreen extent -0.75,-0.7 3.45,0.7
0603 [mm]
  rect 1x0.9 smd: 1(0,0.8) 2(0,-0.8)
  silkscreen extent -0.8,-1.5 0.8,1.5
0805 [mm]
  rect 1.2x1.3 smd: 1(0,0) 2(1.8,0)
  silkscreen extent -0.8,-0.9 2.6,0.9
1210 [mm]
  rect 1.6x3 smd: 1(0,0) 2(3.2,0)
  silkscreen extent -1.1,-1.8 4.3,1.8
1812 [mm]
  rect 2x3.3 smd: 1(0,0) 2(3.8,0)
  silkscreen extent -1.2,-1.9 5,1.9
2512 [mm]
  rect 1.65x3.2 smd: 1(0,0) 2(6.48,0)
  silkscreen extent -1.1,-1.9 7.6,1.9
3528 [mil]
  rect 75x90 smd: 1(0,0) 2(-135,0)
  silkscreen extent -195,-65 65,65
5557-4PIN [mm]
  rect 2.7x2.7 hole 1.7: 1(0,0)
  round 2.7 hole 1.7: 2(5.5,0) 3(0,-4.2) 4(5.5,-4.2)
  silkscreen extent 7.3,-7 19,2.7
7343 [mm]
  rect 4x2.5 smd: 1(0,3.3) 2(0,-3.3)
  silkscreen extent -2.2,-4.8 2.2,4.8
AMP174146 [mm]
  rect 1.7x1.7 hole 1.1: 1(0,0)
  round 1.7 hole 1.1: 2(0,3) 3(2.5,0) 4(2.5,3) 5(5,0) 6(5,3) 7(7.5,0) 8(7.5,3) 9(10,0) 10(10,3) 11(12.5,0) 12(12.5,3) 13(15,0) 14(15,3) 15(17.5,0) 16(17.5,3) 17(20,0) 18(20,3) 19(22.5,0) 20(22.5,3) 21(28.5,0) 22(28.5,3) 23(31,0) 24(31,3) 25(33.5,0) 26(33.5,3) 27(36,0) 28(36,3) 29(38.5,0) 30(38.5,3) 31(41,0) 32(41,3) 33(43.5,0) 34(43.5,3) 35(46,0) 36(46,3)
  Keep-Out Layer circle w0.254: c-5.6,-4.7 r1.8
  Keep-Out Layer circle w0.254: c51.6,-4.7 r1.8
  silkscreen extent -8.8,-18 54.8,-1.8
AMS1117 [mm]
  rect 1x1.5 smd: 1(-2.3,0) 2(0,0) 3(2.3,0)
  rect 3.3x1.5 smd: 4(0,6.3)
  silkscreen extent -3.3,1 3.3,5.3
ANT [mm]
  rect 1x1 smd: 1(0,-1.5)
  rect 1x2.2 smd: 2(1.5,0) 3(-1.5,0)
  silkscreen extent -1.5,-1.5 1.5,1.5
B320A [mm]
  rect 1.6x1.6 smd: 1(0,0) 2(4.8,0)
  silkscreen extent -1,-1.5 5.8,1.5
CON-2PIN [mm]
  rect 1.9x1.9 hole 1: 1(0,0)
  round 1.9 hole 1: 2(-2.54,0)
  silkscreen extent -5.58,-2.6 2.99,3.99
CONN-3P [mm]
  rect 1.9x1.9 hole 1: 1(0,0)
  round 1.9 hole 1: 2(2.54,0) 3(5.08,0)
  silkscreen extent -3,-4 8,2.51
CR1220 [mm]
  rect 5x2.2 smd: 1(7.8,0) 2(-7.35,0)
  Keep-Out Layer circle w0.1: c-3.5,0 r0.5
  Keep-Out Layer circle w0.1: c3.75,0 r0.6
  silkscreen extent -7.32,-7.5 7.8,7.53
DL-10*10.5 [mm]
  rect 1.5x4.5 smd: 1(0,4.4) 2(0,-4.5)
  silkscreen extent -5,-5 5,5
DO214AB [mm]
  rect 2x3.4 smd: 1(7,0) 2(0,0)
  silkscreen extent -1.3,-3.3 8.3,3.3
EM9008 [mm]
  rect 1.4x1.4 hole 0.9: A1(86.9,71.1) C1(6.749,2.048)
  round 1.4 hole 0.9: A2(86.9,69.1) A3(84.9,71.1) A4(84.9,69.1) A5(82.9,71.1) A6(82.9,69.1) A7(80.9,71.1) A8(80.9,69.1) A9(78.9,71.1) A10(78.9,69.1) A11(76.9,71.1) A12(76.9,69.1) A13(74.9,71.1) A14(74.9,69.1) A15(72.9,71.1) A16(72.9,69.1) A17(70.9,71.1) A18(70.9,69.1) A19(68.9,71.1) A20(68.9,69.1) A21(66.9,71.1) A22(66.9,69.1) A23(64.9,71.1) A24(64.9,69.1) A25(62.9,71.1) A26(62.9,69.1) A27(60.9,71.1) A28(60.9,69.1) A29(58.9,71.1) A30(58.9,69.1) A31(56.9,71.1) A32(56.9,69.1) A33(54.9,71.1) A34(54.9,69.1) A35(52.9,71.1) A36(52.9,69.1) A37(50.9,71.1) A38(50.9,69.1) A39(48.9,71.1) A40(48.9,69.1) A41(46.9,71.1) A42(46.9,69.1) A43(44.9,71.1) A44(44.9,69.1) A45(42.9,71.1) A46(42.9,69.1) A47(40.9,71.1) A48(40.9,69.1) A49(38.9,71.1) A50(38.9,69.1) A51(36.9,71.1) A52(36.9,69.1) A53(34.9,71.1) A54(34.9,69.1) A55(32.9,71.1) A56(32.9,69.1) A57(30.9,71.1) A58(30.9,69.1) A59(28.9,71.1) A60(28.9,69.1) B1(45.072,2.048) B2(45.072,4.048) B3(47.072,2.048) B4(47.072,4.048) B5(49.072,2.048) B6(49.072,4.048) B7(51.072,2.048) B8(51.072,4.048) B9(53.072,2.048) B10(53.072,4.048) B11(55.072,2.048) B12(55.072,4.048) B13(57.072,2.048) B14(57.072,4.048) B15(59.072,2.048) B16(59.072,4.048) B17(61.072,2.048) B18(61.072,4.048) B19(63.072,2.048) B20(63.072,4.048) B21(65.072,2.048) B22(65.072,4.048) B23(67.072,2.048) B24(67.072,4.048) B25(69.072,2.048) B26(69.072,4.048) B27(71.072,2.048) B28(71.072,4.048) B29(73.072,2.048) B30(73.072,4.048) B31(75.072,2.048) B32(75.072,4.048) B33(77.072,2.048) B34(77.072,4.048) B35(79.072,2.048) B36(79.072,4.048) B37(81.072,2.048) B38(81.072,4.048) B39(83.072,2.048) B40(83.072,4.048) B41(85.072,2.048) B42(85.072,4.048) B43(87.072,2.048) B44(87.072,4.048) B45(89.072,2.048) B46(89.072,4.048) B47(91.072,2.048) B48(91.072,4.048) C2(6.749,4.048) C3(8.749,2.048) C4(8.749,4.048) C5(10.749,2.048) C6(10.749,4.048) C7(12.749,2.048) C8(12.749,4.048) C9(14.749,2.048) C10(14.749,4.048) C11(16.749,2.048) C12(16.749,4.048) C13(18.749,2.048) C14(18.749,4.048) C15(20.749,2.048) C16(20.749,4.048) C17(22.749,2.048) C18(22.749,4.048) C19(24.749,2.048) C20(24.749,4.048) C21(26.749,2.048) C22(26.749,4.048) C23(28.749,2.048) C24(28.749,4.048) C25(30.749,2.048) C26(30.749,4.048) C27(32.749,2.048) C28(32.749,4.048) C29(34.749,2.048) C30(34.749,4.048) C31(36.749,2.048) C32(36.749,4.048) C33(38.749,2.048) C34(38.749,4.048) C35(40.749,2.048) C36(40.749,4.048)
  round 6 hole 3: M1(3.81,68.895) M2(95.25,68.895) M3(95.25,9.586) M4(3.81,9.586)
  silkscreen extent 0,0 99.06,73.41
IND-4.7UH-4A [mm]
  rect 2.2x1.6 smd: 1(0,-3.3) 2(0,3.3)
  silkscreen extent -3.2,-3.2 3.2,3.2
IND-8.2UH-10A [mm]
  rect 5.4x3 smd: 1(0,5) 2(0,-5)
  silkscreen extent -6,-6 6,6
LED0603 [mm]
  rect 1x0.9 smd: 1(0,0) 2(0,-1.6)
  silkscreen extent -0.7,-2.5 0.7,0.6
LQFP44 [mm]
  oval 1.6x0.4 smd: 1(0,0)
  rect 1.6x0.4 smd: 2(0,-0.8) 3(0,-1.6) 4(0,-2.4) 5(0,-3.2) 6(0,-4) 7(0,-4.8) 8(0,-5.6) 9(0,-6.4) 10(0,-7.2) 11(0,-8) 23(12,-8) 24(12,-7.2) 25(12,-6.4) 26(12,-5.6) 27(12,-4.8) 28(12,-4) 29(12,-3.2) 30(12,-2.4) 31(12,-1.6) 32(12,-0.8) 33(12,0)
  rect 0.4x1.6 smd: 12(2,-10) 13(2.8,-10) 14(3.6,-10) 15(4.4,-10) 16(5.2,-10) 17(6,-10) 18(6.8,-10) 19(7.6,-10) 20(8.4,-10) 21(9.2,-10) 22(10,-10) 34(10,2) 35(9.2,2) 36(8.4,2) 37(7.6,2) 38(6.8,2) 39(6,2) 40(5.2,2) 41(4.4,2) 42(3.6,2) 43(2.8,2) 44(2,2)
  silkscreen extent 1.33,-8.67 10.67,0.67
LQFP48 [mm]
  oval 1.2x0.3 smd: 1(0,0)
  rect 1.2x0.3 smd: 2(0,-0.5) 3(0,-1) 4(0,-1.5) 5(0,-2) 6(0,-2.5) 7(0,-3) 8(0,-3.5) 9(0,-4) 10(0,-4.5) 11(0,-5) 12(0,-5.5) 25(9,-5.5) 26(9,-5) 27(9,-4.5) 28(9,-4) 29(9,-3.5) 30(9,-3) 31(9,-2.5) 32(9,-2) 33(9,-1.5) 34(9,-1) 35(9,-0.5) 36(9,0)
  rect 0.3x1.2 smd: 13(1.75,-7.25) 14(2.25,-7.25) 15(2.75,-7.25) 16(3.25,-7.25) 17(3.75,-7.25) 18(4.25,-7.25) 19(4.75,-7.25) 20(5.25,-7.25) 21(5.75,-7.25) 22(6.25,-7.25) 23(6.75,-7.25) 24(7.25,-7.25) 37(7.25,1.75) 38(6.75,1.75) 39(6.25,1.75) 40(5.75,1.75) 41(5.25,1.75) 42(4.75,1.75) 43(4.25,1.75) 44(3.75,1.75) 45(3.25,1.75) 46(2.75,1.75) 47(2.25,1.75) 48(1.75,1.75)
  silkscreen extent 1.13,-6.11 7.86,0.62
LQFP64 [mm]
  oval 2x0.27 smd: 1(0,0)
  rect 2x0.27 smd: 2(0,-0.5) 3(0,-1) 4(0,-1.5) 5(0,-2) 6(0,-2.5) 7(0,-3) 8(0,-3.5) 9(0,-4) 10(0,-4.5) 11(0,-5) 12(0,-5.5) 13(0,-6) 14(0,-6.5) 15(0,-7) 16(0,-7.5) 33(12.2,-7.5) 34(12.2,-7) 35(12.2,-6.5) 36(12.2,-6) 37(12.2,-5.5) 38(12.2,-5) 39(12.2,-4.5) 40(12.2,-4) 41(12.2,-3.5) 42(12.2,-3) 43(12.2,-2.5) 44(12.2,-2) 45(12.2,-1.5) 46(12.2,-1) 47(12.2,-0.5) 48(12.2,0)
  rect 0.27x2 smd: 17(2.35,-9.85) 18(2.85,-9.85) 19(3.35,-9.85) 20(3.85,-9.85) 21(4.35,-9.85) 22(4.85,-9.85) 23(5.35,-9.85) 24(5.85,-9.85) 25(6.35,-9.85) 26(6.85,-9.85) 27(7.35,-9.85) 28(7.85,-9.85) 29(8.35,-9.85) 30(8.85,-9.85) 31(9.35,-9.85) 32(9.85,-9.85) 49(9.85,2.35) 50(9.35,2.35) 51(8.85,2.35) 52(8.35,2.35) 53(7.85,2.35) 54(7.35,2.35) 55(6.85,2.35) 56(6.35,2.35) 57(5.85,2.35) 58(5.35,2.35) 59(4.85,2.35) 60(4.35,2.35) 61(3.85,2.35) 62(3.35,2.35) 63(2.85,2.35) 64(2.35,2.35)
  silkscreen extent 1.54,-8.31 10.66,0.81
LTC3780EG [mm]
  rect 1.8x0.42 smd: 1(0,0)
  oval 1.8x0.42 smd: 2(0,-0.65) 3(0,-1.3) 4(0,-1.95) 5(0,-2.6) 6(0,-3.25) 7(0,-3.9) 8(0,-4.55) 9(0,-5.2) 10(0,-5.85) 11(0,-6.5) 12(0,-7.15) 13(6.95,-7.15) 14(6.95,-6.5) 15(6.95,-5.85) 16(6.95,-5.2) 17(6.95,-4.55) 18(6.95,-3.9) 19(6.95,-3.25) 20(6.95,-2.6) 21(6.95,-1.95) 22(6.95,-1.3) 23(6.95,-0.65) 24(6.95,0)
  silkscreen extent 1.46,-7.48 5.49,0.33
MARK [mm]
  round 1 smd paste-0.5 mask+0.6: ""(0,0)
  Keep-Out Layer circle w0.2: c0,0 r1.2
MINI-MELF [mil]
  rect 60x60 smd: 1(135,0) 2(0,0)
  silkscreen extent -39,-39 173,39
MINI-PCIE [mm]
  rect 0.6x2 smd: 1(0.7,-4.1) 2(1.1,4.1) 3(1.5,-4.1) 4(1.9,4.1) 5(2.3,-4.1) 6(2.7,4.1) 7(3.1,-4.1) 8(3.5,4.1) 9(3.9,-4.1) 10(4.3,4.1) 11(4.7,-4.1) 12(5.1,4.1) 13(5.5,-4.1) 14(5.9,4.1) 15(6.3,-4.1) 16(6.7,4.1) 17(10.3,-4.1) 18(10.7,4.1) 19(11.1,-4.1) 20(11.5,4.1) 21(11.9,-4.1) 22(12.3,4.1) 23(12.7,-4.1) 24(13.1,4.1) 25(13.5,-4.1) 26(13.9,4.1) 27(14.3,-4.1) 28(14.7,4.1) 29(15.1,-4.1) 30(15.5,4.1) 31(15.9,-4.1) 32(16.3,4.1) 33(16.7,-4.1) 34(17.1,4.1) 35(17.5,-4.1) 36(17.9,4.1) 37(18.3,-4.1) 38(18.7,4.1) 39(19.1,-4.1) 40(19.5,4.1) 41(19.9,-4.1) 42(20.3,4.1) 43(20.7,-4.1) 44(21.1,4.1) 45(21.5,-4.1) 46(21.9,4.1) 47(22.3,-4.1) 48(22.7,4.1) 49(23.1,-4.1) 50(23.5,4.1) 51(23.9,-4.1) 52(24.3,4.1)
  rect 5x5 hole 2.5 slot 3.5 at 90 deg: M5(24.6,48.05) M6(0.4,48.05)
  rect 2.3x3.2 smd: ""(-2.15,-3.5) ""(27.1,-3.5)
  Keep-Out Layer circle w0.1: c0,0 r0.8
  Keep-Out Layer circle w0.1: c25,0 r0.55
  silkscreen extent -2.5,-7.3 27.5,51
MM3Z5V1ST1G [mm]
  rect 1x1 smd: 1(-1.35,0) 2(1.35,0)
  silkscreen extent -2.1,-0.7 2.1,0.7
MT2#1 [mm]
  round 6 hole 3.5: ""(14.2,4.9)
MT2#2 [mm]
  round 6 hole 3.5: ""(-13.4,-2.2)
MT2#3 [mm]
  round 6 hole 3.5: ""(-3.2,13)
MT2#4 [mm]
  round 6 hole 3.5: ""(16.4,3.4)
NEO-6 [mm]
  rect 1.8x0.8 smd: 1(0,0) 2(0,1.1) 3(0,2.2) 4(0,3.3) 5(0,4.4) 6(0,5.5) 7(0,6.6) 8(-0.1,9.6) 9(-0.1,10.7) 10(-0.1,11.8) 11(-0.1,12.9) 12(-0.1,14) 13(-12.3,14) 14(-12.3,12.9) 15(-12.3,11.8) 16(-12.3,10.7) 17(-12.3,9.6) 18(-12.4,6.6) 19(-12.4,5.5) 20(-12.4,4.4) 21(-12.4,3.3) 22(-12.4,2.2) 23(-12.4,1.1) 24(-12.4,0)
  silkscreen extent -12.4,-1 0,15
NPN [mil]
  rect 36x50 smd: 1(38,80)
  rect 36x36 smd: 2(0,0) 3(75,0)
  silkscreen extent -20,-5 95,85
POWERPAK [mm]
  rect 1.27x0.6 smd: 1(0,0) 2(0,-1.27) 3(0,-2.54) 4(0,-3.81)
  rect 1.02x0.6 smd: 5(5.45,-3.81) 6(5.45,-2.54) 7(5.45,-1.27) 8(5.45,0)
  rect 3.9x3.8 smd: ""(3.42,-1.92)
  silkscreen extent -1.44,-0.2 -1.04,0.2
PW020 [mm] "Shrink Small Outline; 20 Leads; Body Width 4.4 mm; Pitch 0.65 mm"
  rect 0.3x1.65 smd: 1(2.925,2.775) 2(2.275,2.775) 3(1.625,2.775) 4(0.975,2.775) 5(0.325,2.775) 6(-0.325,2.775) 7(-0.975,2.775) 8(-1.625,2.775) 9(-2.275,2.775) 10(-2.925,2.775) 11(-2.925,-2.775) 12(-2.275,-2.775) 13(-1.625,-2.775) 14(-0.975,-2.775) 15(-0.325,-2.775) 16(0.325,-2.775) 17(0.975,-2.775) 18(1.625,-2.775) 19(2.275,-2.775) 20(2.925,-2.775)
  silkscreen extent -3.3,-1.55 3.75,2.9
RJ45 [mm]
  round 1.4 hole 0.9: 1(-4.45,6.35) 2(-3.18,8.89) 3(-1.91,6.35) 4(-0.64,8.89) 5(0.63,6.35) 6(1.9,8.89) 7(3.17,6.35) 8(4.44,8.89)
  round 3 hole 1.6: 9(-7.75,-4.57) 10(7.75,-4.57)
  Keep-Out Layer circle w0.15: c5.72,0 r1.63
  Keep-Out Layer circle w0.15: c-5.72,0 r1.63
  silkscreen extent -7.92,-10.8 7.94,10.39
SIMLOCK2 [mm]
  rect 2.3x1 smd: 1(0,0) 2(0,-2.54) 3(0,-5.08) 4(0,-1.27) 6(0,-6.35) ""(0,-3.81) ""(0,-7.62) ""(0,-8.89)
  rect 2.95x1.5 smd: ""(20.7,-13.26) ""(20.7,7.29)
  Keep-Out Layer circle w0.254: c21.47,-11.15 r0.7
  Keep-Out Layer circle w0.254: c11.67,4.9 r0.7
  silkscreen extent -0.55,-12.7 25.75,6.7
SMD-XTAL-5032 [mm]
  rect 1.7x1.4 smd: 1(-1.9,-1.2) 2(1.9,1.2) ""(-1.9,1.2) ""(1.9,-1.2)
  silkscreen extent -2.5,-2.7 2.5,1.6
SO8 [mm] "Small Outline; 8 Leads; Body Width 3.9 mm; Pitch 1.27 mm"
  rect 0.6x2.2 smd: 1(-1.905,-2.6) 2(-0.635,-2.6) 3(0.635,-2.6) 4(1.905,-2.6) 5(1.905,2.6) 6(0.635,2.6) 7(-0.635,2.6) 8(-1.905,2.6)
  silkscreen extent -2.88,-2.72 2.5,1.1
SO-16 [mil] "Small Outline; 16 Leads; Body Width 5.6 mm; Pitch 1.27 mm"
  oval 24x80 smd: 1(0,0) 2(50,0) 3(100,0) 4(150,0) 5(200,0) 6(250,0) 7(300,0) 8(350,0) 9(350,220) 10(300,220) 11(250,220) 12(200,220) 13(150,220) 14(100,220) 15(50,220) 16(0,220)
  silkscreen extent -25,60 375,160
SOT23-5 [mm]
  rect 0.5x1 smd: 1(0,0) 2(1,0) 3(2,0) 4(2,3) 5(0,3)
  silkscreen extent -0.7,0.6 2.7,2.4
SOT23-6 [mm]
  rect 0.5x1 smd: 1(0,0) 2(1,0) 3(2,0) 4(2,3) 5(1,3) 6(0,3)
  silkscreen extent -0.7,0.6 2.7,2.4
SOT143 [mm] "SOT-143; 4 Leads; Body 3 x 2.5 mm, inc. leads (LxW max)"
  rect 1.4x1.1 smd: 1(-0.05,0)
  rect 0.95x1.1 smd: 2(1.65,0) 3(1.65,2.4) 4(-0.25,2.4)
  silkscreen extent -1.05,-1.12 2.45,1.9
SOT753 [mm]
  rect 1x0.6 smd: 1(0,0)
  oval 1x0.6 smd: 2(0,-0.95) 3(0,-1.9) 4(3,-1.9) 5(3,0)
  silkscreen extent -1.2,-2.5 3,0.6
SSOP24 [mm]
  rect 2x0.45 smd: 1(0,0)
  oval 2x0.45 smd: 2(0,-0.65) 3(0,-1.3) 4(0,-1.95) 5(0,-2.6) 6(0,-3.25) 7(0,-3.9) 8(0,-4.55) 9(0,-5.2) 10(0,-5.85) 11(0,-6.5) 12(0,-7.15) 13(7.9,-7.15) 14(7.9,-6.5) 15(7.9,-5.85) 16(7.9,-5.2) 17(7.9,-4.55) 18(7.9,-3.9) 19(7.9,-3.25) 20(7.9,-2.6) 21(7.9,-1.95) 22(7.9,-1.3) 23(7.9,-0.65) 24(7.9,0)
  silkscreen extent -1.68,-7.48 6.06,0.33
TFCARD-2 [mm]
  rect 0.7x1.6 smd: 1(2.2,10.5) 2(1.1,10.5) 3(0,10.5) 4(-1.1,10.5) 5(-2.2,10.5) 6(-3.3,10.5) 7(-4.4,10.5) 8(-5.5,10.5) 9(-6.6,10.5)
  rect 1.2x1.4 smd: 10(-7.75,10)
  rect 1.2x2.2 smd: ""(-7.75,0.4)
  rect 1.6x1.4 smd: ""(6.85,10)
  rect 1.2x2.2 smd paste+0: ""(7.75,0.4)
  Keep-Out Layer circle w0.1: c3.05,0 r0.5
  Keep-Out Layer circle w0.1: c-4.93,0 r0.5
  silkscreen extent -7.35,-4.5 7.35,10
TSOP48 [mm]
  rect 1x0.3 smd: 1(0,0)
  oval 1x0.3 smd: 2(0,-0.5) 3(0,-1) 4(0,-1.5) 5(0,-2) 6(0,-2.5) 7(0,-3) 8(0,-3.5) 9(0,-4) 10(0,-4.5) 11(0,-5) 12(0,-5.5) 13(0,-6) 14(0,-6.5) 15(0,-7) 16(0,-7.5) 17(0,-8) 18(0,-8.5) 19(0,-9) 20(0,-9.5) 21(0,-10) 22(0,-10.5) 23(0,-11) 24(0,-11.5) 25(20,-11.5) 26(20,-11) 27(20,-10.5) 28(20,-10) 29(20,-9.5) 30(20,-9) 31(20,-8.5) 32(20,-8) 33(20,-7.5) 34(20,-7) 35(20,-6.5) 36(20,-6) 37(20,-5.5) 38(20,-5) 39(20,-4.5) 40(20,-4) 41(20,-3.5) 42(20,-3) 43(20,-2.5) 44(20,-2) 45(20,-1.5) 46(20,-1) 47(20,-0.5) 48(20,0)
  silkscreen extent 1.33,-11.75 18.67,0.25
TSOT23-8 [mm]
  rect 1.2x0.3 smd: 1(0,0)
  oval 1.2x0.3 smd: 2(0,-0.65) 3(0,-1.3) 4(0,-1.95) 5(2.6,-1.95) 6(2.6,-1.3) 7(2.6,-0.65) 8(2.6,0)
  silkscreen extent -1.2,-2.4 3.4,0.4
USB-HOST-2 [mm]
  round 1.524 hole 1: 1(7,-2.6) 2(4.5,-2.6) 3(2.5,-2.6) 4(0,-2.6) 5(7,0) 6(4.5,0) 7(2.5,0) 8(0,0)
  round 3.5 hole 2.3: 9(10.1,2.7) 10(-3.1,2.7) 11(-3.1,-3) 12(10.1,-3)
  silkscreen extent -3.7,-4 10.7,13
XH2.0-2P-SMD [mm]
  oval 1x3.5 smd: 1(0,0)
  rect 1x3.5 smd: 2(-2,0)
  rect 1.5x3.4 smd: ""(-4.4,5.7) ""(2.4,5.7)
  silkscreen extent -5.5,-2.1 3.5,7.7
XTAL [mm]
  round 0.9 hole 0.5: 1(0,0) 2(1.3,0)
  silkscreen extent -0.9,-8 2.1,-0.7

## Part data
BT1: "Multicell Battery"
C1 C2 C3 C4 C6 C7 C18 C21 C24 C28 C32 C34 C35 C38 C40 C45 C46 C47 C48 C49 C50 C51 C67 C68 C69 C70 C71 C72 C88 C98 C99 C100 C101 C104: library part "CAP NP_Dup2"
C5 C10 C11 C12 C13 C19 C29 C86 C105: library part "CAP WP"
C8 C9 C109 C110 C111 C112 C113 C114 C116 C118 C120 C122 C124 C125 C126: library part CAP
C14 C77 C80 C81 C82 C83 C84 C85 C89 C90 C91 C92 C93 C96 C97: library part "P_CAP NP"
C15 C16 C23 C26 C27 C30 C36 C37 C42 C43 C44 C52 C53 C54 C55 C56 C59 C60 C61 C62 C63 C64 C65 C66: library part Cap, "Capacitor"
C17 C20: library part 06033C223KAT1A_0
C22: library part 06033C103KAT2A
C25: library part 06035A470KAT1A_0
C31 C33: library part 06033C103KAT2A_0
C39 C41 C57 C58 C73 C74 C87 C102 C103 C106 C107 C108: library part CAP_Dup1
C75 C76 C78 C79: library part 10U-6032-20V, "CAP;10U  ,TT,20V ,20%,6032,SMT"
D1 D2 D6 D8 D19 D20 D22 D24 D26: library part 1N4148WS-7-F_SOD323-2
D3 D4 D14 D15 D16 D17 D18: library part LN01401_1
D5 D7 D11 D21 D23 D25: library part MMGZ5231BPTLL34
D9 D10 D12 D13: library part "Diode 11DQ03", "Schottky Rectifier"
F1 F2 F3 F4: library part 2A_32VDC_0467-002
J1: library part "Header 4", "Header, 4-Pin"
J2 J7: library part "Header 2", "Header, 2-Pin"
J4: library part MOLEX_1, "CON;HDR,MA,9P,RA,H2.7,SMT"
J8: library part HRS_U_0.FL-R-SMT-10
J9: library part "Header 12", "Header, 12-Pin"
J10: library part NET
J11 J12: library part "Header 3", "Header, 3-Pin"
J13: library part "Header 18X2H", "Header, 18-Pin, Dual row, Right Angle"
L1 L2 L3: library part 4.7UH_CDH2D09BNP-4R7MC_0.7A_20%
L4 L5 L6 L8 L11: library part INDUCTOR_4
L12: library part 2.2UH_LPS3015-222MLC_1.5A_20%~D
M2: library part NEO-5M
Q1 Q2: library part SI4431DY, "P-Channel 30V (D-S)  MOSFET"
Q3 Q4 Q5 Q6 Q11 Q13 Q14 Q15: library part MMBT3904_NL_SOT23-3
Q7 Q8 Q9 Q10: library part SI4410DY, "N-Channel 30V (D-S)  MOSFET"
R1 R2 R3 R4 R5 R6 R10 R12 R17 R18 R19 R20 R22 R23 R25 R28 R30 R31 R32 R33 R34 R35 R36 R37 R38 R39 R40 R41 R42 R43 R44 R45 R46 R47 R48 R49 R50 R51 R54 R55 R56 R57 R58: library part CR16-1003FM
R7 R8 R90 R91 R92 R93 R94 R95 R96 R97 R98 R99 R100 R101 R102 R103 R104 R106 R108 R109 R110 R111 R112: library part P_R
R13 R14 R15 R16 R113 R114 R115 R116 R117 R118 R119 R120: library part R
R21 R24: library part CR16-1241FM
R26: library part CR16-1133FM
R27: library part CR16-8061FM
R29: library part CR16-224JM
R59 R60 R61 R62 R66 R70 R71 R72 R73 R74 R75 R76 R77 R78 R79 R80 R81 R82: library part Res3, "Resistor"
R83 R84 R85 R86 R87: library part R_Dup1
R88: library part RESISTOR
U1: library part LT1963EST-1_4.8
U3 U4: library part MP1482_5
U6 U17: library part MAX811
U7: library part K9GBG08U0A
U9: library part upd720114_QFP_4
U11: library part XR16V554IV_4
U12 U21: library part 74LVC1G04GW_SOT353-5
U13: library part TLV320AIC1106PWG4, "PCM CODEC With Microphone Amps & Speaker Driver, 20-Pin TSSOP"
U16: library part AP1212
Y1 Y2 Y3 Y4: library part CRYSTAL

## Via types
v1: diameter 0.5, hole 0.3, Top Side to Bottom Side, tented both sides, 937 vias
v2: diameter 0.7, hole 0.4, Top Side to Bottom Side, tented both sides, 4 vias
v3: diameter 0.8, hole 0.5, Top Side to Bottom Side, tented both sides, 1 vias
v4: diameter 0.5, hole 0.3, Top Side to Bottom Side, 1 vias

## Nets (pads, with @x,y where several pads share a name; then routed paths per layer and width w, separated by ;. In a path a pad name is that pad's centre, name@x,y a point inside that pad or via, vN(x,y) a via of type N, cw(c..) or ccw(c..) an arc to the next point about the centre after c; other vN are vias at no path point)
3G-LED: D14.2 U5.19 | length 13.4
  Top Side w0.2: U5.19@113.2,102.5 115.403,102.5 115.703,102.2 123.6,102.2 124.4,103 D14.2@124.4,104.7
485-EN: M1.A32
AGND: C89.1 C92.1 L11.1 U13.4 U13.8 | length 9
  Top Side w0.2: U13.4@103.475,67.925 v1@104.875,67.925 ; U13.8@103.475,70.525 105.375,70.525 v1(105.6,70.3)
  Bottom Side w0.5: v1(104.9,67.9) 105.4,67.9 105.9,68.4 C89.1@105.9,69.2 L11.1@107.7,69.2 ; C89.1@105.6,69.5 C92.1@105.6,71.1
AIN1: J13.22 M1.C31 | length 91.9
  Top Side w0.2: v1(86.35,39.65) M1.C31@80.452,39.649 ; M1.C31@80.452,39.649 M1.C31@80.452,39.649
  Bottom Side w0.2: v1(86.35,39.65) 86.35,43.2 89.25,46.1 89.25,76.45 90.8,78 90.8,111.169 95.081,115.45 98.566,115.45 100.7,117.584 J13.22@100.7,117.7
AIN2: J13.26 M1.C27 | length 91.8
  Top Side w0.2: M1.C27@80.452,35.649 85.651,35.649 v1(85.7,35.6)
  Bottom Side w0.2: v1(85.7,35.6) 85.3,36 85.3,43.281 88.45,46.431 88.45,76.781 90,78.331 90,111.5 95.7,117.2 J13.26@95.7,117.7
AIN3: J13.30 M1.C23 | length 93
  Top Side w0.2: M1.C23@80.452,31.649 80.453,31.65 v1(84.75,31.65)
  Bottom Side w0.2: v1(84.75,31.65) 84.5,31.9 84.5,43.613 87.65,46.763 87.65,77.113 89.2,78.663 89.2,111.831 90.7,113.331 J13.30@90.7,117.7
AIN4: J13.34 M1.C19 | length 95.7
  Bottom Side w0.2: M1.C19@80.452,27.649 82.649,27.649 83.7,28.7 83.7,43.944 86.85,47.094 86.85,77.444 88.4,78.994 88.4,113.45 85.7,116.15 J13.34@85.7,117.7
AIN5: M1.C15
AIN6: M1.C11
AIN7: M1.C7
AIN8: M1.C3
ALARM: D21.1 J13.18 | length 16.1
  Bottom Side w0.2: D21.1@97.471,111.8 97.471,113.071 98.2,113.8 105.05,113.8 105.95,114.7 108.3,114.7 109.2,115.6 J13.18@109.2,117.7
ALARM-LED: U5.27
ALARM-SIG: Q13.1 R54.2 U5.40 | length 9.1
  Top Side w0.2: R54.2@97.8,99.6 98.3,100.1 v1(99.5,100.1) U5.40@101.2,100.1
  Bottom Side w0.2: v1(99.5,100.1) 101.1,100.1 101.565,100.565 Q13.1@101.565,103.768
AVDD: C89.2 C92.2 L8.1 U13.6 | length 8.9
  Top Side w0.2: v1(101.2,69.2) 103.45,69.2 U13.6@103.475,69.225
  Bottom Side w0.5: L8.1@101.2,71.1 v1(101.2,69.2) C89.2@104.1,69.2 ; C89.2@104,69.3 C92.2@104,71.1
BCKP: M2.22 R111.1 R112.2 | length 7.5
  Top Side w0.5: v1(126.1,15.7) 126.2,15.8 M2.22@126.2,17.4
  Bottom Side w0.5: v1(126.1,15.7) R112.2@126.1,21.5
C-PWR-CTRL: U5.37 U21.2 | length 121.8
  Top Side w0.2: U5.37@101.2,102.5 v1(103.35,102.5)
  Bottom Side w0.2: U21.2@97.4,16.15 96.4,16.15 96.1,15.85 96.1,12.75 97.85,11 112.55,11 114.4,12.85 114.4,52.05 113.4,53.05 113.4,73.666 103.95,83.116 103.95,88.616 102,90.566 102,94.284 102.75,95.034 102.75,100.184 103.35,100.784 v1(103.35,102.5)
CAM-PWR: R10.1 R48.2 U5.31 | length 48.9
  Top Side w0.2: R48.2@104.2,109.6 104.2,108.6 104.8,108 U5.31@104.8,106.9 104.85,106.85 104.85,103.722 104.8,103.672 v1(104.8,99.75)
  Bottom Side w0.2: v1(104.8,99.75) 104.8,99.9 107.6,99.9 114.3,93.2 120.3,93.2 122.2,91.3 R10.1@122.2,73.7
CELLULAR-PWR: C14.1 C75.1 C76.1 C78.1 C79.1 C90.2 C91.2 J5.2 J5.24 J5.39 J5.41 J5.52 L8.2 R90.2 R106.2 R109.2 U13.14 U14.2 U14.3 | length 27
  Top Side w0.2: R106.2@92.2,74.8 v1(92.2,76.2) ; U13.14@97.925,69.875 99.475,69.875 v1@99.5,69.9
  Top Side w0.5: J5.52@90.9,49.7 v1(90.9,52.1) ; v1(95.3,55.3) J5.41@95.3,57.9 ; v1(96.1,55.3) J5.39@96.1,57.9 ; J5.24@102.1,49.7 v1(102.1,52.1) ; v1(107.4,74) R90.2@108.6,74 ; v1(111.5,53.1) 113.6,53.1 114.1,52.6 J5.2@114.1,49.7
  Bottom Side w0.2: R109.2@105.6,63.7 v1(106.8,63.7)
  Bottom Side w0.5: C91.2@96.8,69.2 C90.2@96.8,71.1 L8.2@99.6,71.1 v1(99.6,69.9)
  other v1: 100.8,25.7 101.7,25.7 100.8,26.6 101.7,26.6 100.8,27.4 101.7,27.4 100.8,28.2 101.7,28.2 100.8,29 101.7,29 100.8,30.5 101.7,30.5 100.8,31.4 101.7,31.4 100.8,32.2 101.7,32.2 100.8,33 101.7,33 100.8,33.8 101.7,33.8 100.8,35.3 101.7,35.3 100.8,36.2 101.7,36.2 100.8,37 101.7,37 100.8,37.8 101.7,37.8 100.8,38.6 101.7,38.6 100.8,40 101.7,40 100.8,40.9 101.7,40.9 100.8,41.7 101.7,41.7 100.8,42.5 101.7,42.5 100.8,43.3 101.7,43.3 90.9,51.4 102.1,51.4 112.2,53.1 95.3,56.2 96.1,56.2
CELLULAR-RESET: J5.22 U5.34 | length 70.3
  Top Side w0.2: U5.34@101.2,104.9 102.3,104.9 v1(102.7,104.5) ; J5.22@102.9,49.7 v1(102.9,51.4)
  Bottom Side w0.2: v1(102.7,104.5) 102.7,100.7 102.35,100.35 102.35,95.2 101.6,94.45 101.6,90.4 103.55,88.45 103.55,82.95 113,73.5 113,55.15 111.7,53.85 104,53.85 102.9,52.75 v1(102.9,51.4)
CP1: F1.2 J13.23 | length 4
  Bottom Side w2: J13.23@98.2,120.7 F1.2@98.2,124.7
CP2: F2.2 J13.27 | length 4
  Bottom Side w2: J13.27@93.2,120.7 F2.2@93.2,124.7
CP3: F3.2 J13.31 | length 4
  Bottom Side w2: J13.31@88.2,120.7 F3.2@88.2,124.7
CP4: F4.2 J13.35 | length 4
  Bottom Side w2: J13.35@83.2,120.7 F4.2@83.2,124.7
DOOR: D25.1 J13.15 | length 12.7
  Bottom Side w0.2: D25.1@105.771,111.8 105.771,113.871 106.2,114.3 108.466,114.3 110.5,116.334 110.5,119.5 J13.15@111.7,120.7
DOOR-SIG: Q15.1 R56.2 U5.1 | length 18.9
  Top Side w0.2: R56.2@103.2,91.6 v1(103.2,93.4) U5.1@103.2,94.9
  Bottom Side w0.2: v1(103.2,93.4) 103.95,94.15 103.95,100.85 104.75,101.65 109.015,101.65 109.765,102.4 Q15.1@109.765,103.768
E0RX_N: J10.6 M1.A59 | length 111.3
  Bottom Side w0.2: M1.A59@11.4,31.8 12.4,30.8 15.434,30.8 19.617,34.983 19.617,35.051 19.7,35.134 19.7,112.184 23.25,115.734 23.25,122.516 22.491,123.275 18.109,123.275 16.967,122.133 16.967,120.717 16.35,120.1 15.534,120.1 14.444,119.01 J10.6@14.3,119.01
E0RX_P: J10.3 M1.A60 | length 101.7
  Bottom Side w0.2: M1.A60@13.4,31.8 13.5,31.7 15.7,31.7 19.3,35.3 19.3,112.35 22.85,115.9 22.85,122.35 22.325,122.875 19.025,122.875 18.11,121.96 J10.3@18.11,121.55
E0TX_N: J10.2 M1.A57 | length 90.7
  Bottom Side w0.2: M1.A57@11.4,33.8 12.4,34.8 13.814,34.8 13.831,34.817 16.017,34.817 18,36.8 18,113.3 19.5,114.8 19.5,118.89 J10.2@19.38,119.01
E0TX_P: J10.1 M1.A58 | length 92
  Bottom Side w0.2: M1.A58@13.4,33.8 14.017,34.417 16.183,34.417 18.4,36.634 18.4,113.134 20.65,115.384 J10.1@20.65,121.55
EBIA0: M1.B43 U11.24 | length 52.4
  Top Side w0.2: v1(41.6,86.8) 41.4,86.8 41.3,86.9 41.3,91.469 43.1,93.269 43.1,94.869 43.831,95.6 67.134,95.6 70.534,92.2 76.2,92.2 77.428,90.972 79.428,90.972 80.428,89.972 M1.B43@80.452,89.972
  Bottom Side w0.2: U11.24@38.65,85.85 40.222,85.85 41.172,86.8 v1(41.6,86.8)
EBIA1: M1.B46 U11.23 | length 50.5
  Top Side w0.2: v1(41.05,85.9) 41.1,85.9 40.9,86.1 40.9,91.634 42.7,93.434 42.7,95.034 43.666,96 67.3,96 67.8,95.5 67.834,95.5 70.734,92.6 77.3,92.6 77.928,91.972 M1.B46@78.452,91.972
  Bottom Side w0.2: U11.23@38.65,85.35 40.5,85.35 v1(41.05,85.9)
EBIA2: M1.B45 U11.22 | length 53.6
  Top Side w0.2: v1(40.5,84.8) 40.5,91.8 42.3,93.6 42.3,95.2 43.5,96.4 67.5,96.4 70.9,93 78,93 78.028,92.972 79.452,92.972 M1.B45@80.452,91.972
  Bottom Side w0.2: U11.22@38.65,84.85 40.55,84.85 v1(40.5,84.8)
EBIA3: M1.B48 U10.2 | length 27.1
  Bottom Side w0.2: U10.2@59.9,85.47 62.17,85.47 63,86.3 63,93.4 64.4,94.8 67.8,94.8 68.9,93.7 78.18,93.7 M1.B48@78.452,93.972
EBIA4: M1.B47 U10.3 | length 28.7
  Bottom Side w0.2: U10.3@59.9,86.74 61.64,86.74 62.6,87.7 62.6,93.566 64.234,95.2 67.966,95.2 69.066,94.1 76.1,94.1 77,95 79.424,95 M1.B47@80.452,93.972
EBICS1: M1.B21 R83.1 U10.1 | length 32.3
  Top Side w0.2: v1(61.6,82.5) 63.3,82.5 64.4,81.4 70.1,81.4 74.5,77 74.5,70.2 75.728,68.972 79.452,68.972 M1.B21@80.452,67.972
  Bottom Side w0.2: U10.1@59.9,84.2 R83.1@59.9,82.5 v1(61.6,82.5)
EBID0: M1.B42 U11.53 | length 28.1
  Top Side w0.2: v1(55.6,88.55) 77.874,88.55 M1.B42@78.452,87.972
  Bottom Side w0.2: U11.53@50.85,87.85 54.822,87.85 55.522,88.55 v1(55.6,88.55)
EBID1: M1.B40 U11.54 | length 28.6
  Top Side w0.2: v1(55.6,87.85) 76.574,87.85 M1.B40@78.452,85.972
  Bottom Side w0.2: U11.54@50.85,87.35 55.022,87.35 55.522,87.85 v1(55.6,87.85)
EBID2: M1.B38 U11.55 | length 29.5
  Top Side w0.2: v1(55.6,87.15) 76.05,87.15 77.262,85.938 77.262,85.162 M1.B38@78.452,83.972
  Bottom Side w0.2: U11.55@50.85,86.85 55.222,86.85 55.522,87.15 v1(55.6,87.15)
EBID3: M1.B36 U11.56 | length 30.5
  Top Side w0.2: v1(55.6,86.45) 75.75,86.45 76.8,85.4 76.8,83.624 M1.B36@78.452,81.972
  Bottom Side w0.2: U11.56@50.85,86.35 55.5,86.35 v1(55.6,86.45)
EBID4: M1.B34 U11.57 | length 31.5
  Top Side w0.2: v1(55.6,85.75) 75.25,85.75 76.2,84.8 76.2,82.224 M1.B34@78.452,79.972
  Bottom Side w0.2: U11.57@50.85,85.85 55.5,85.85 v1(55.6,85.75)